# Altium PCB PCB1.PcbDoc
Units mm, origin at the board's own origin, x right, y up, seen from the top; angles counter-clockwise.
Board outline 120 x 170 mm, 2 copper layers (Top Layer, Bottom Layer), stack 1.571 mm thick; 67 components, 49 nets, 279 pads, 46 vias.
Unrouted connection lines stored in the file: 1.
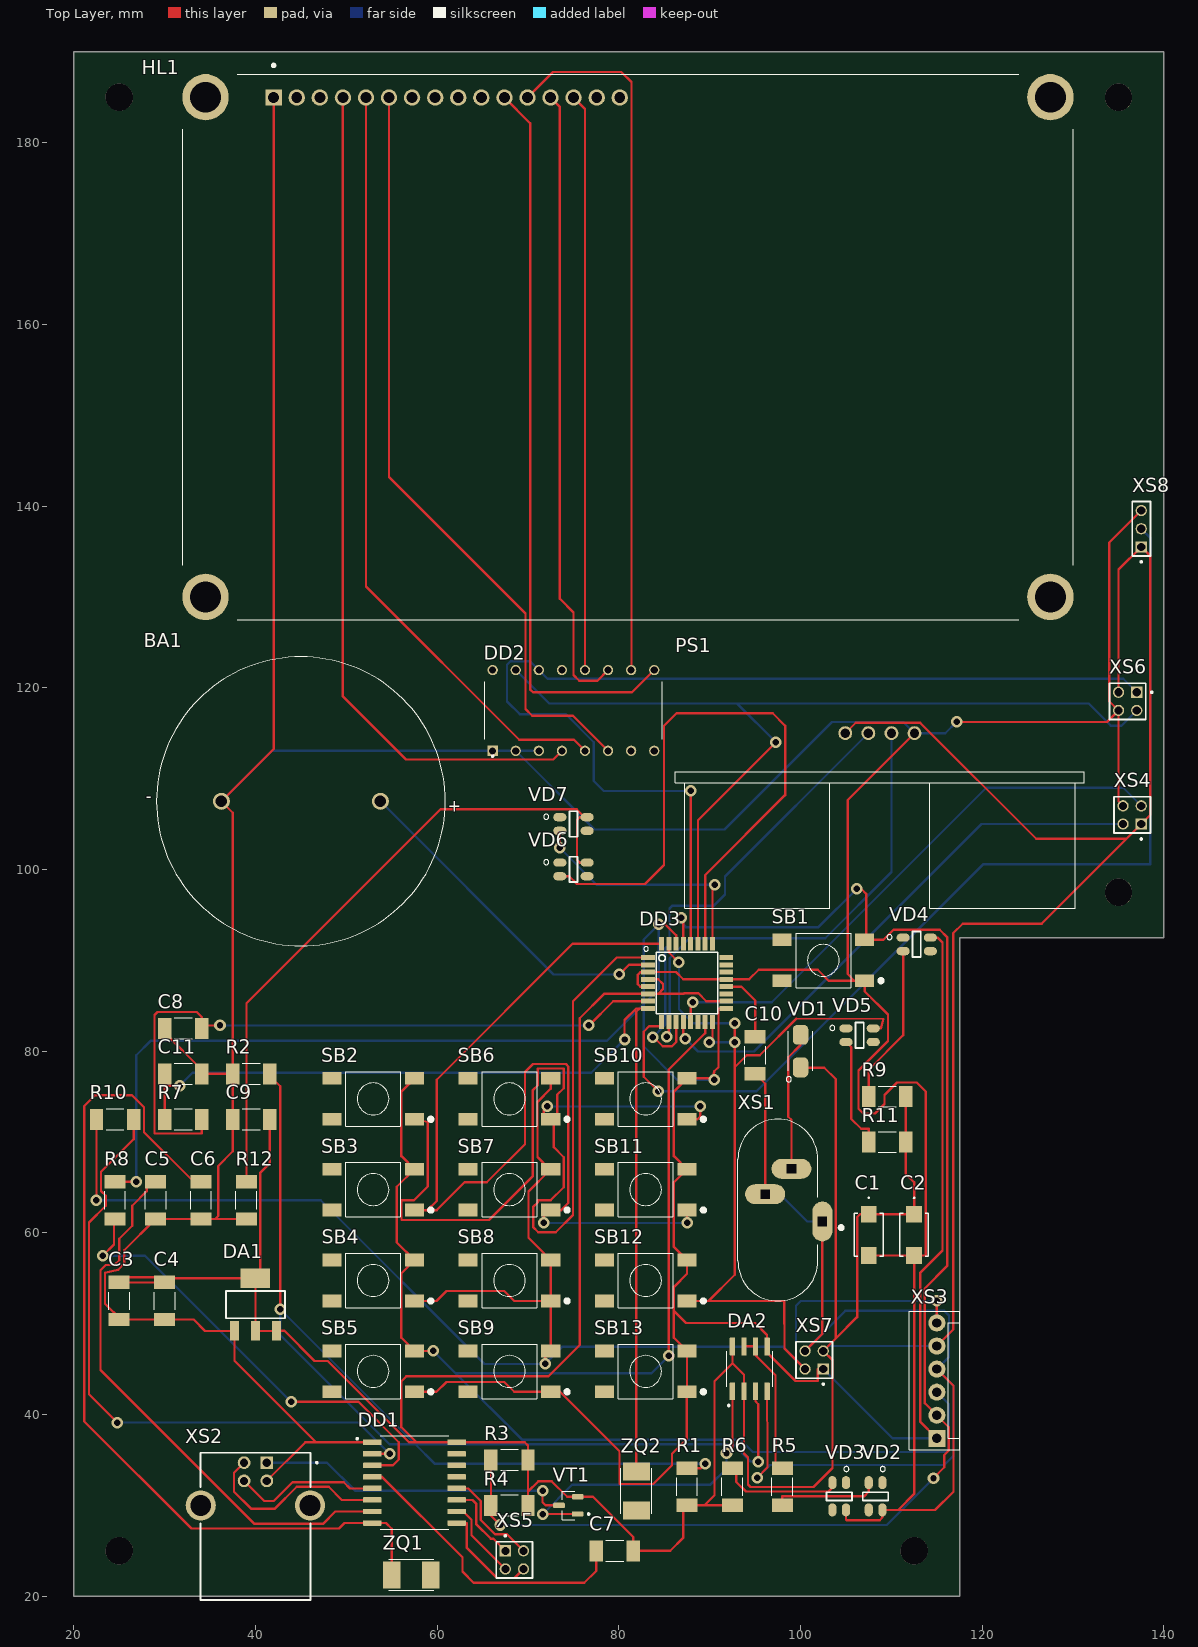
[diagram p0: Top Layer view]
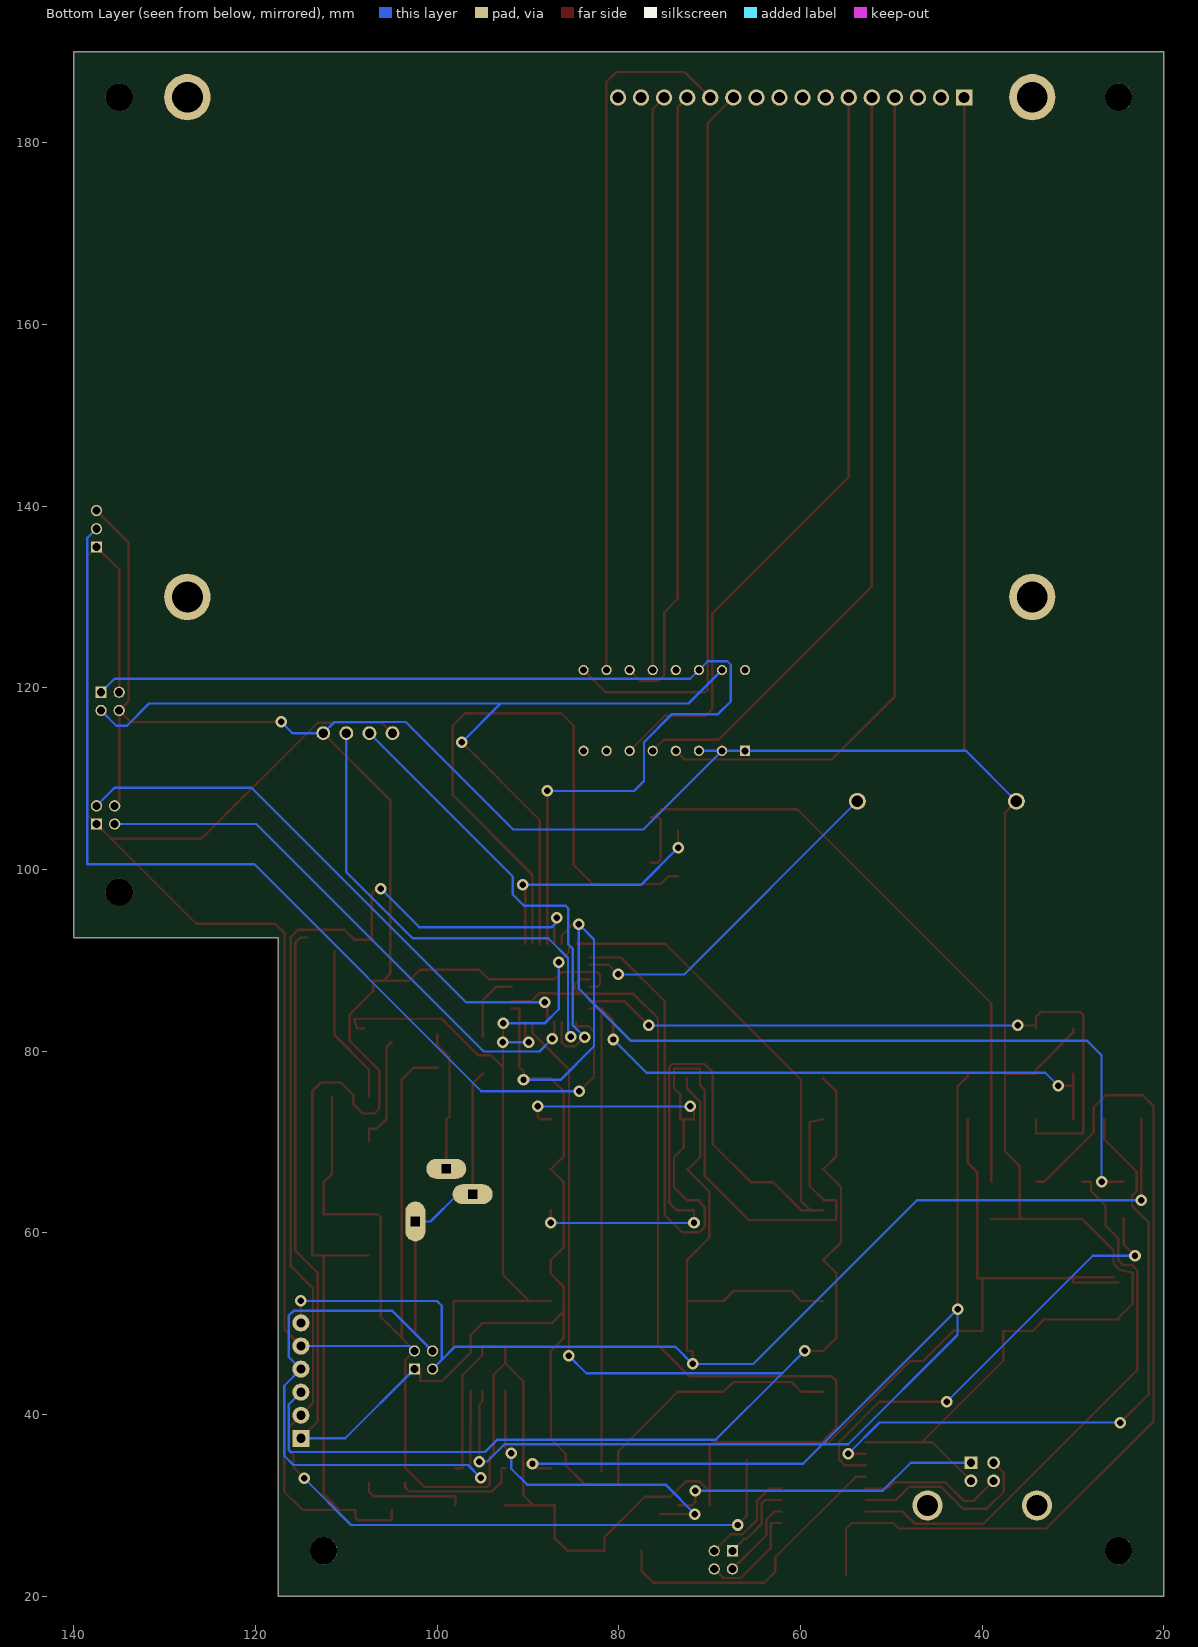
[diagram p1: Bottom Layer view, seen from below]
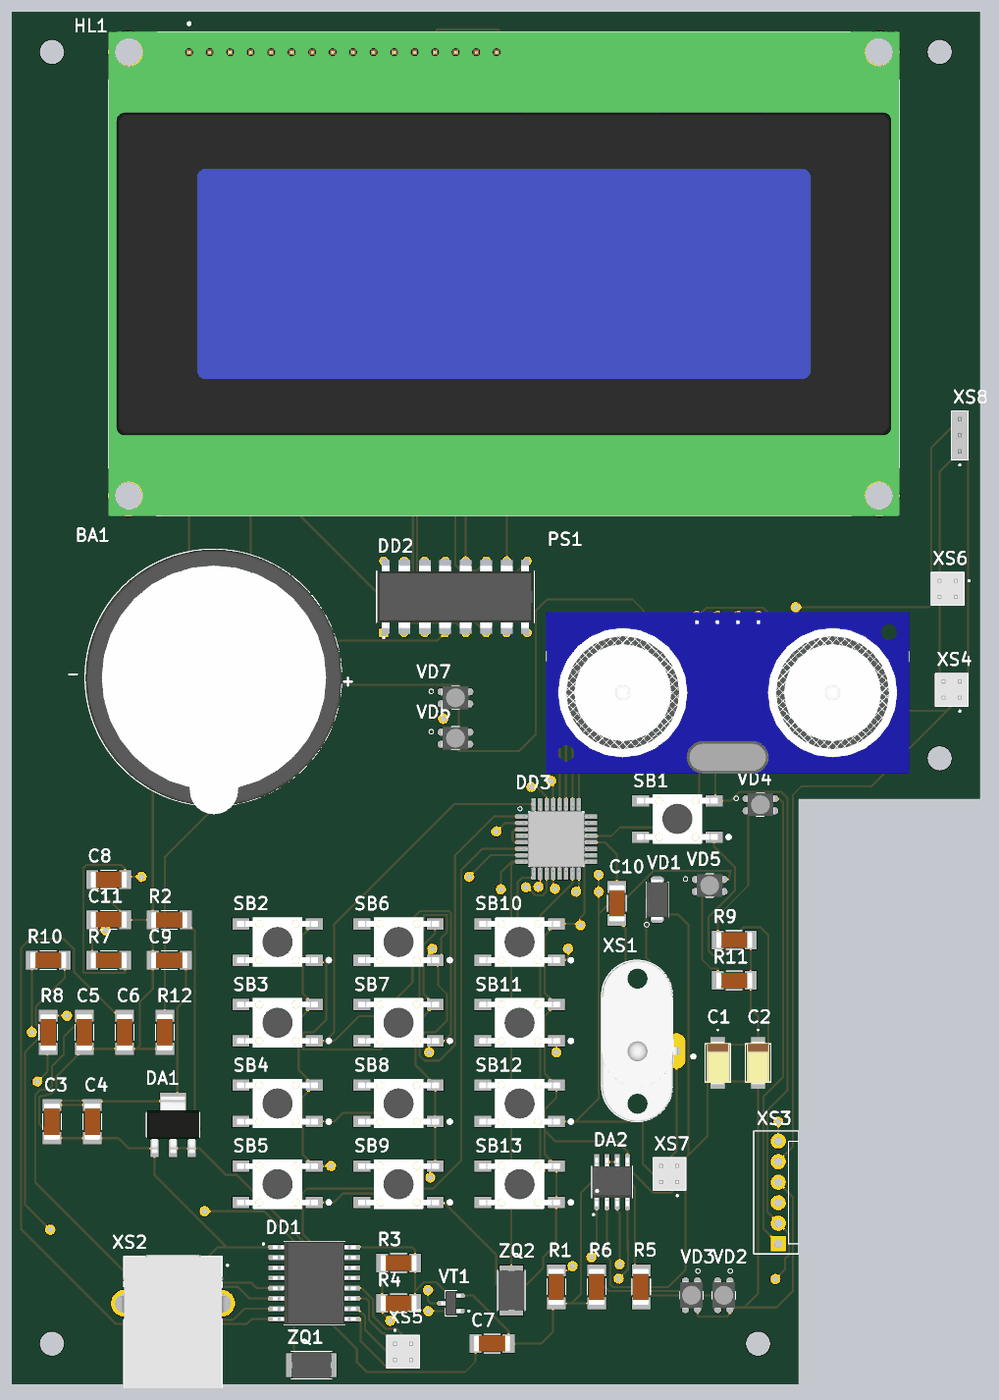
[diagram p2: 3D render of the assembled board from above, using the file's embedded part models]

## Layer stack, top to bottom
Top Solder: solder mask 0.0102, Solder Resist, Dk 3.5
Top Layer: signal copper 0.0356
Dielectric 1: dielectric 1.5, FR-4, Dk 4.8
Bottom Layer: signal copper 0.0356
Bottom Solder: solder mask 0.0102, Solder Resist, Dk 3.5

## Board outline
140,92.5 117.5,92.5 117.5,20 20,20 20,190 140,190

## Design rules (kind name [scope] priority, off if disabled: settings)
Clearance [All] p1: gap=0.254 ignorepadtopadclearanceinfootprint=FALSE except(0: Arc-Hole Track-Hole SMDPad-Hole THPad-Hole Via-Hole Fill-Hole Poly-Hole Region-Hole Text-Hole)
PolygonConnect [All] p1: connectstyle=Relief reliefconductorwidth=0.254 reliefentries=4 polygonreliefangle="90 Angle" airgapwidth=0.254
RoutingVias [All] p1: holewidth=0.711 width=1.27 viastyle="Through Hole" minholewidth=0.711 minwidth=1.27 maxholewidth=0.711 maxwidth=1.27
SolderMaskExpansion [All] p1: expansion=0.102 istentingtop=FALSE
Width "OTHERS width" [InNetClass('OTHER NETS')] p1: maxlimit=0.5 minlimit=0.25 preferedwidth=0.375
Width "POWER width" [InNetClass('POWER NETS')] p2: maxlimit=1 minlimit=0.5 preferedwidth=0.75
Width [All] p3: maxlimit=0.254 minlimit=0.254 preferedwidth=0.254
30 further rules are at their usual default settings.

## Classes and differential pairs
component class Sheet1: *T1 BA1 C1 C2 C3 C4 C5 C6 C7 C8 C9 C10 C11 DA1 DA2 DD1 DD2 DD3 HL1 PS1 R1 R2 R3 R4 R6 R7 R8 R10 R12 SB1 SB2 SB3 SB4 SB5 SB6 SB7 SB8 SB9 SB10 SB11 SB12 SB13 VD1 VD2 VD3 VD4 VD5 VD6 VD7 XS1 XS2 XS3 XS4 XS5 XS6 XS7 XS8 ZQ1 ZQ2

## Components (designator, comment, footprint, x,y, rotation, side; value= is the part's Value field where it differs from the comment)
BA1 "*" CUI_CVS-3108 45,107.5 r180 top
C1 "UPM1C152MHD" SMA/DO-214AC_DTC 107.5,59.77 r270 top
C2 "UPM1C152MHD" SMA/DO-214AC_DTC 112.5,59.77 r270 top
C3 "*" CAPC4520X200N 25,52.5 r90 top
C4 "*" CAPC4520X200N 30,52.5 r90 top
C5 "*" CAPC4520X200N 29.001,63.57 r90 top
C6 "*" CAPC4520X200N 34.001,63.57 r90 top
C7 "*" CAPC4520X200N 79.542,25 r180 top
C8 "*" CAPC4520X200N 32.042,82.5 r0 top
C9 "*" CAPC4520X200N 39.542,72.5 r0 top
C10 "*" CAPC4520X200N 95,79.542 r90 top
C11 "*" CAPC4520X200N 32.042,77.5 r180 top
DA1 "*" SOT230P700X180-4N 40,52.1 r90 top
DA2 "*" SOIC127P599X175-8N 94.405,45.03 r90 top
DD1 "*" SOIC127P1030X265-16N 57.5,32.5 r0 top
DD2 "*" DIP794W45P254L1969H508Q16 75,117.5 r90 top
DD3 "*" QFP80P900X900X120-32N 87.5,87.5 r0 top
HL1 "*" LCD_LCD-20X4B 81,157.5 r0 top
PS1 "*" XCVR_HC-SR04 108.73,115 r0 top
R1 "*" CAPC4520X200N 87.5,32.042 r270 top
R2 "*" CAPC4520X200N 39.542,77.5 r0 top
R3 "*" CAPC4520X200N 67.958,35 r0 top
R4 "*" CAPC4520X200N 67.958,30 r0 top
R5 "*" CAPC4520X200N 98,32.042 r270 top
R6 "*" CAPC4520X200N 92.5,32.042 r270 top
R7 "*" CAPC4520X200N 32.042,72.5 r0 top
R8 "*" CAPC4520X200N 24.542,63.57 r90 top
R9 "*" CAPC4520X200N 109.542,75 r0 top
R10 "*" CAPC4520X200N 24.542,72.5 r180 top
R11 "*" CAPC4520X200N 109.542,70 r0 top
R12 "*" CAPC4520X200N 39.001,63.57 r270 top
SB1 "4-1437565-9" TE_4-1437565-9 102.5,90 r180 top
SB2 "4-1437565-9" TE_4-1437565-9 52.95,74.75 r180 top
SB3 "4-1437565-9" TE_4-1437565-9 52.95,64.75 r180 top
SB4 "4-1437565-9" TE_4-1437565-9 52.95,54.75 r180 top
SB5 "4-1437565-9" TE_4-1437565-9 52.95,44.75 r180 top
SB6 "4-1437565-9" TE_4-1437565-9 67.95,74.75 r180 top
SB7 "4-1437565-9" TE_4-1437565-9 67.95,64.75 r180 top
SB8 "4-1437565-9" TE_4-1437565-9 67.95,54.75 r180 top
SB9 "4-1437565-9" TE_4-1437565-9 67.95,44.75 r180 top
SB10 "4-1437565-9" TE_4-1437565-9 82.95,74.75 r180 top
SB11 "4-1437565-9" TE_4-1437565-9 82.95,64.75 r180 top
SB12 "4-1437565-9" TE_4-1437565-9 82.95,54.75 r180 top
SB13 "4-1437565-9" TE_4-1437565-9 82.95,44.75 r180 top
VD1 "*" DIOAD1060W80L520D270 100,80 r90 top
VD2 "*" SOJ150P350X210-4N 108.25,31 r270 top
VD3 "*" SOJ150P350X210-4N 104.25,31 r270 top
VD4 "*" SOJ150P350X210-4N 112.787,91.75 r0 top
VD5 "*" SOJ150P350X210-4N 106.5,81.75 r0 top
VD6 "*" SOJ150P350X210-4N 75,100 r0 top
VD7 "*" SOJ150P350X210-4N 75,105 r0 top
VT1 "*" SOT95P237X112-3N 74.441,30 r180 top
XS1 "*" CUI_PJ-038B 97.5,62.5 r180 top
XS2 "*" SAMTEC_USB-B-S-X-X-TH 40,30 r0 top
XS3 "*" MOLEX-1X6 115,37.38 r90 top
XS4 "*" SAMTEC_TW-02-03-T-D-335-100 137.5,105 r90 top
XS5 "*" SAMTEC_TW-02-03-T-D-335-100 67.5,25 r270 top
XS6 "*" SAMTEC_TW-02-03-T-D-335-100 137,119.5 r180 top
XS7 "*" SAMTEC_TW-02-03-T-D-335-100 102.5,45 r90 top
XS8 "*" SAMTEC_TW-03-12-L-S-765-200 137.5,135.5 r270 top
ZBOAS205282114 "Comment" "BOASVIEWdrill:Таблица отверстий:0:0:0:0" 52.125,2085.7 r0 top
ZBOAS255984055 "Слой 1" "BOASVIEWlayer:Top Layer:2:1:1:1" 65,2135 r0 top (schematic designator fewf)
ZBOAS255984055 "Comment" "BOASVIEWlayer:Top Overlay:2:1:33:1" 65,2135 r0 top (schematic designator fewf)
ZBOAS1466597440 "Comment" "BOASVIEWside:Вид платы слева:2:0:0:0" 372.5,2475 r0 top
ZBOAS1742184055 "Слой 2" "BOASVIEWlayer:Bottom Layer:2:-2:32:1" 442.5,2135 r180 top (schematic designator fewf)
ZQ1 "*" XTAL500X320X130N 57.15,22.346 r180 top
ZQ2 "*" XTAL500X320X130N 81.93,31.584 r90 top

## Footprints (in the part's own frame and the unit in brackets; to place one, negate y for a bottom-side part, rotate by r counter-clockwise, add the part's x,y. Pads: shape width x height; smd on the part's side, far side on the other; paste and mask are expansions set on the pad)
"BOASVIEWdrill:Таблица отверстий:0:0:0:0" [mm]
"BOASVIEWlayer:Bottom Layer:2:-2:32:1" [mm]
"BOASVIEWlayer:Top Layer:2:1:1:1" [mm]
"BOASVIEWlayer:Top Overlay:2:1:33:1" [mm]
"BOASVIEWside:Вид платы слева:2:0:0:0" [mm]
CAPC4520X200N [mm]
  rect 1.47x2.31 smd: 1(-2.042,0) 2(2.042,0)
  silkscreen extent -0.98,-1.15 0.98,1.15, body extent -2.25,-1.02 2.25,0.98, height 2.02
CUI_CVS-3108 [mm]
  round 1.875 hole 1.25: N(8.75,0) P(-8.75,0)
  silkscreen extent -15.9,-15.9 15.9,15.9, body extent -15.97,-15.87 15.82,16.92, height 15.1
CUI_PJ-038B [mm]
  oval 2.2x4.4 hole 1 square: 1(-4.9,1.25)
  oval 4.4x2.2 hole 1 square: 2(-1.5,-4.55) 3(1.4,-1.75)
  silkscreen extent -7.16,-10 4.4,10, body extent -5.11,-9.97 4.34,10.03, height 13.57
DIOAD1060W80L520D270 [mm]
  rrect54% 2.17x1.69 smd: A(1.795,0) C(-1.795,0)
  silkscreen extent -3.4,-1.36 2.19,1.6, body extent -2.6,-1.35 2.6,1.38, height 2.62
DIP794W45P254L1969H508Q16 [mm]
  rect 1.13x1.13 hole 0.78: 1(-4.445,8.89)
  round 1.13 hole 0.78: 2(-4.445,6.35) 3(-4.445,3.81) 4(-4.445,1.27) 5(-4.445,-1.27) 6(-4.445,-3.81) 7(-4.445,-6.35) 8(-4.445,-8.89) 9(4.445,-8.89) 10(4.445,-6.35) 11(4.445,-3.81) 12(4.445,-1.27) 13(4.445,1.27) 14(4.445,3.81) 15(4.445,6.35) 16(4.445,8.89)
  silkscreen extent -5.13,-9.78 3.18,9.77, body extent -5.46,-9.65 5.46,9.65, height 5.08
LCD_LCD-20X4B [mm]
  rect 1.8x1.8 hole 1.2: 1(-39,27.46)
  round 1.8 hole 1.2: 2(-36.46,27.46) 3(-33.92,27.46) 4(-31.38,27.46) 5(-28.84,27.46) 6(-26.3,27.46) 7(-23.76,27.46) 8(-21.22,27.46) 9(-18.68,27.46) 10(-16.14,27.46) 11(-13.6,27.46) 12(-11.06,27.46) 13(-8.52,27.46) 14(-5.98,27.46) 15(-3.44,27.46) 16(-0.9,27.46)
  round 5.1 hole 3.4: S1(-46.5,27.5) S2(46.5,27.5) S3(-46.5,-27.5) S4(46.5,-27.5)
  silkscreen extent -49,-30 49,31.15, body extent -49,-30 49,30, height 13.54
MOLEX-1X6 [mil]
  rect 74x74 hole 40: 1(0,0)
  round 74 hole 40: 2(100,0) 3(200,0) 4(300,0) 5(400,0) 6(500,0)
  silkscreen extent -50,-100 550,120
QFP80P900X900X120-32N [mm]
  rect 1.5x0.55 smd: 1(-4.3,2.8) 2(-4.3,2) 3(-4.3,1.2) 4(-4.3,0.4) 5(-4.3,-0.4) 6(-4.3,-1.2) 7(-4.3,-2) 8(-4.3,-2.8) 17(4.3,-2.8) 18(4.3,-2) 19(4.3,-1.2) 20(4.3,-0.4) 21(4.3,0.4) 22(4.3,1.2) 23(4.3,2) 24(4.3,2.8)
  rect 0.55x1.5 smd: 9(-2.8,-4.3) 10(-2,-4.3) 11(-1.2,-4.3) 12(-0.4,-4.3) 13(0.4,-4.3) 14(1.2,-4.3) 15(2,-4.3) 16(2.8,-4.3) 25(2.8,4.3) 26(2,4.3) 27(1.2,4.3) 28(0.4,4.3) 29(-0.4,4.3) 30(-1.2,4.3) 31(-2,4.3) 32(-2.8,4.3)
  silkscreen extent -4.75,-3.4 3.4,4, body extent -4.5,-4.49 4.5,4.51, height 1.1
SAMTEC_TW-02-03-T-D-335-100 [mm]
  rect 1.24x1.24 hole 0.89: 01(0,0)
  round 1.24 hole 0.89: 02(0,2) 03(2,0) 04(2,2)
  silkscreen extent -1.75,-1 3,3, body extent -0.98,-0.98 3.02,3.02, height 4.57
SAMTEC_TW-03-12-L-S-765-200 [mm]
  rect 1.24x1.24 hole 0.89: 01(0,0)
  round 1.24 hole 0.89: 02(-2,0) 03(-4,0)
  silkscreen extent -5,-1 1.75,1, body extent -5.03,-1.02 0.97,0.98, height 5.08
SAMTEC_USB-B-S-X-X-TH [mm]
  rect 1.408x1.408 hole 0.9: 1(1.25,4.7)
  round 1.408 hole 0.9: 2(-1.25,4.7) 3(-1.25,2.7) 4(1.25,2.7)
  round 3.316 hole 2.3: S1(-6.02,0) S2(6.02,0)
  silkscreen extent -6.05,-10.4 6.85,5.8, body extent -7.25,-10.51 7.25,5.99, height 10.7
SMA/DO-214AC_DTC [mm]
  rect 1.849x1.752 smd paste+0 mask+0: N(2.27,0) P(-2.27,0)
  silkscreen extent -4.16,-1.57 2.37,1.57, body extent -2.64,-1.4 2.64,1.4, height 2.34
SOIC127P599X175-8N [mm]
  rrect25% 1.97x0.6 smd: 1(-2.47,1.905) 2(-2.47,0.635) 3(-2.47,-0.635) 4(-2.47,-1.905) 5(2.47,-1.905) 6(2.47,-0.635) 7(2.47,0.635) 8(2.47,1.905)
  silkscreen extent -4.14,-2.53 1.95,2.52, body extent -3,-2.45 3,2.45, height 1.75
SOIC127P1030X265-16N [mm]
  rrect25% 2.06x0.6 smd: 1(-4.64,4.445) 2(-4.64,3.175) 3(-4.64,1.905) 4(-4.64,0.635) 5(-4.64,-0.635) 6(-4.64,-1.905) 7(-4.64,-3.175) 8(-4.64,-4.445) 9(4.64,-4.445) 10(4.64,-3.175) 11(4.64,-1.905) 12(4.64,-0.635) 13(4.64,0.635) 14(4.64,1.905) 15(4.64,3.175) 16(4.64,4.445)
  silkscreen extent -6.4,-5.15 3.75,5.15, body extent -5.15,-5.15 5.15,5.15, height 2.65
SOJ150P350X210-4N [mm]
  oval 1.45x0.9 smd: 1(-1.5,0.75) 2(-1.5,-0.75) 3(1.5,-0.75) 4(1.5,0.75)
  silkscreen extent -3.28,-1.4 0.45,1.4, body extent -1.75,-1.4 1.75,1.4, height 2.04
SOT95P237X112-3N [mm]
  rrect50% 1.3x0.59 smd: 1(-1.025,0.95) 2(-1.025,-0.95) 3(1.025,0)
  silkscreen extent -2.32,-1.56 0.7,1.56, body extent -1.2,-1.45 1.2,1.45, height 1.11
SOT230P700X180-4N [mm]
  rect 2.15x1 smd: 1(-2.9,2.3) 2(-2.9,0) 3(-2.9,-2.3)
  rect 2.15x3.25 smd: 4(2.9,0)
  silkscreen extent -1.5,-3.25 1.5,3.25, body extent -3.47,-3.25 3.52,3.25, height 1.68
TE_4-1437565-9 [mm]
  rect 2.1x1.4 smd: 1(-4.55,2.25) 2(4.55,2.25) 3(-4.55,-2.25) 4(4.55,-2.25)
  silkscreen extent -6.55,-3 3,3, body extent -5,-3 5,3, height 4.98
XCVR_HC-SR04 [mm]
  round 1.53 hole 1.02: 1(-3.81,0) 2(-1.27,0) 3(1.27,0) 4(3.81,0)
  silkscreen extent -22.5,-19.27 22.5,-4.27, body extent -22.5,-19.37 22.5,8.16, height 12.38
XTAL500X320X130N [mm]
  rect 1.95x2.95 smd: 1(-2.15,0) 2(2.15,0)
  silkscreen extent -2.5,-1.7 2.5,1.7, body extent -2.5,-1.65 2.5,1.65, height 1.3

## Part data
BA1: library part CVS-3108, "31.8 mm, Round Frame, 0.1 W, 8 Ohm, Neodymium Magnet, Mylar Cone, Speaker", Package="CUI Inc.", Arrow_Electronics-Purchase-URL=https://snapeda.com/shop?store=Arrow+Electronics&id=1474279, Availability=Good, CUI_purchase_URL=https://www.cuidevices.com/product/audio/speakers/miniature-(10-mm~40-mm)/cvs-3108?utm_source=snapeda.com&utm_medium=referral&utm_campaign=snapedaBOM, DigiKey-Purchase-URL=https://snapeda.com/shop?store=DigiKey&id=1474279, MF="CUI Devices", Mouser-Purchase-URL=https://snapeda.com/shop?store=Mouser&id=1474279, MP=CVS-3108, Price=None, SnapEDA_Link=https://www.snapeda.com/parts/CVS-3108/CUI%20Devices/view-part/1474279/?ref=snap
C1 C2: "1500ÂµF 16V Aluminum Electrolytic Capacitors Radial, Can 5000 Hrs @ 105Â°C", Package="Radial Nichicon", Availability=Warning, Check_prices=https://www.snapeda.com/parts/UPM1C152MHD/Nichicon/view-part/2322603/?ref=eda, MF=Nichicon, MP=UPM1C152MHD, Price=None, Purchase-URL=https://pricing.snapeda.com/search/part/UPM1C152MHD/?ref=eda, SnapEDA_Link=https://www.snapeda.com/parts/UPM1C152MHD/Nichicon/view-part/2322603/?ref=snap
C3 C4 C5 C6 C7 C8 C9 C10 C11: library part 1808Y5K00101JXT, Package=None, Availability=Unavailable, MP=1808Y5K00101JXT, Price=None
DA1: library part NCP1117ST50T3G, "Linear Voltage Regulator IC 1 Output 1A SOT-223", Package="TO-261-4 ON Semiconductor", Availability=Unavailable, MF="ON Semiconductor", MP=NCP1117ST50T3G, Price=None, SnapEDA_Link=https://www.snapeda.com/parts/NCP1117ST50T3G/ON%20Semiconductor/view-part/836318/?ref=snap
DA2: library part LM358D, "Dual standard operational amplifier 8-SOIC 0 to 70", Package="SOIC-8 Texas Instruments", Arrow_Asia-Purchase-URL=https://snapeda.com/shop?store=Arrow+Asia&id=4793021, Arrow_Electronics-Purchase-URL=https://snapeda.com/shop?store=Arrow+Electronics&id=4793021, Digi-Key_Part_Number=296-1014-2-ND, DigiKey-Purchase-URL=https://snapeda.com/shop?store=DigiKey&id=4793021, MF="Texas Instruments", Mouser-Purchase-URL=https://snapeda.com/shop?store=Mouser&id=4793021, MP=LM358D, SnapEDA_Link=https://www.snapeda.com/parts/LM358D/Texas%20Instruments/view-part/4793021/?ref=snap, Texas_Instruments-Purchase-URL=https://snapeda.com/shop?store=Texas+Instruments&id=4793021
DD1: library part CH340, "Circuit Breaker Magnetic 3Pole 40A 240VAC", Package=None, Availability=Unavailable, MF=Eaton, MP=CH340, Price=None, SnapEDA_Link=https://www.snapeda.com/parts/CH340/Eaton/view-part/4701946/?ref=snap
DD2: library part PCF8574N, "Remote 8-Bit I/O Expander for I2C-Bus", Package="PDIP-16 Texas Instruments", Arrow_Electronics-Purchase-URL=https://snapeda.com/shop?store=Arrow+Electronics&id=271889, Availability=Unavailable, DigiKey-Purchase-URL=https://snapeda.com/shop?store=DigiKey&id=271889, MF="Texas Instruments", Mouser-Purchase-URL=https://snapeda.com/shop?store=Mouser&id=271889, MP=PCF8574N, Price=None, SnapEDA_Link=https://www.snapeda.com/parts/PCF8574N/Texas%20Instruments/view-part/271889/?ref=snap, Texas_Instruments-Purchase-URL=https://snapeda.com/shop?store=Texas+Instruments&id=271889
DD3: library part ATMEGA328P-AU, "AVR AVRÂ® ATmega Microcontroller IC 8-Bit 20MHz 32KB _16K x 16_ FLASH 32-TQFP _7x7_", Package="TQFP-32 Microchip", Availability=Unavailable, MF=Microchip, MP=ATMEGA328P-AU, Price=None, SnapEDA_Link=https://www.snapeda.com/parts/ATMEGA328P-AU/Microchip/view-part/44280/?ref=snap
HL1: library part LCD-20X4B, "Display Development Tools 20X4 CHARACTER BLUE LCD W/BACKLIGHT", Package=None, Availability=Unavailable, MF=Gravitech, Mouser-Purchase-URL=https://snapeda.com/shop?store=Mouser&id=833821, MP=LCD-20X4B, Price=None, SnapEDA_Link=https://www.snapeda.com/parts/LCD-20X4B/Gravitech/view-part/833821/?ref=snap
PS1: library part HC-SR04, "HC-SR04 Ultrasonic Sensor Platform Evaluation Expansion Board", Package=None, Availability=Unavailable, MF="SparkFun Electronics", MP=HC-SR04, Price=None, SnapEDA_Link=https://www.snapeda.com/parts/HC-SR04/SparkFun%20Electronics/view-part/341106/?ref=snap
R1 R2 R3 R4 R5 R6 R7 R8 R9 R10 R11 R12: library part Component_1
SB1 SB2 SB3 SB4 SB5 SB6 SB7 SB8 SB9 SB10 SB11 SB12 SB13: "Switch Tactile OFF _ON_ SPST Round Button Gull Wing 0.05A 12VDC 1.57N SMD Loose Piece", Contact_Current_Rating="50 mA", Package=None, Configuration_Pole-Throw="Single Pole - Single Throw", Digi-Key_Part_Number=450-1133-ND, Digi-Key_Purchase_URL=https://www.digikey.com/product-detail/en/te-connectivity-alcoswitch-switches/FSM6JSMA/450-1133-ND/525822?utm_source=snapeda&utm_medium=aggregator&utm_campaign=symbol, EU_RoHS_Compliance=Compliant, MF="TE Connectivity", MP=FSM6JSMA, SnapEDA_Link=https://www.snapeda.com/parts/FSM6JSMA/TE%20Connectivity%20ALCOSWITCH%20Switches/view-part/522766/?ref=snap, TE_purchase_URL=https://www.te.com/usa-en/product-4-1437565-9.html?te_bu=Cor&te_type=disp&te_campaign=seda_glo_cor-seda-global-disp-prtnr-fy19-seda-model-bom-cta_sma-317_1&elqCampaignId=32493
VD1: library part 1N4007, "Diode Standard 1000V 1A Through Hole DO-204AL _DO-41_", Package="DO-41 Good-Ark", Availability=Unavailable, MF="ON Semiconductor", MP=1N4007, Price=None, SnapEDA_Link=https://www.snapeda.com/parts/1N4007/ON%20Semiconductor/view-part/2816213/?ref=snap
VD2 VD3 VD4 VD5 VD6 VD7: library part CLA1A-WKW-CXAYB153, "LED Lighting - White, Cool 5500K 3.6V 30mA 4-PLCC", Package="PLCC-4 Cree", Digi-Key_Part_Number=CLA1A-WKW-CXAYB153CT-ND, Digi-Key_Purchase_URL=https://www.digikey.com/product-detail/en/cree-inc/CLA1A-WKW-CXAYB153/CLA1A-WKW-CXAYB153CT-ND/3659978?utm_source=snapeda&utm_medium=aggregator&utm_campaign=symbol, MF="Cree Inc.", MP=CLA1A-WKW-CXAYB153, SnapEDA_Link=https://www.snapeda.com/parts/CLA1A-WKW-CXAYB153/Cree%20Inc./view-part/1050629/?ref=snap
VT1: library part IRLML6402TRPBF, "RoHS Compliant", Package="SOT-23 Infineon", Availability=Unavailable, MF=Infineon, MP=IRLML6402TRPBF, Price=None, SnapEDA_Link=https://www.snapeda.com/parts/IRLML6402TRPBF/Infineon%20Technologies/view-part/523558/?ref=snap
XS1: library part PJ-038B, "2.5 x 6.2 mm, 2.5 A, Horizontal, Panel Mount, Dc Power Jack Connector", Package=None, Availability=Unavailable, MF="CUI Devices", MP=PJ-038B, Price=None, SnapEDA_Link=https://www.snapeda.com/parts/PJ-038B/CUI%20Devices/view-part/1494366/?ref=snap
XS2: library part USB-B-S-X-X-TH, "USB-B (USB TYPE-B) USB 2.0 Receptacle Connector 4 Position Through Hole, Right Angle", Package=None, Availability=Unavailable, MF=Samtec, MP=USB-B-S-S-B-TH, Price=None, SnapEDA_Link=https://www.snapeda.com/parts/USB-B-S-S-B-TH/Samtec%20Inc./view-part/230656/?ref=snap, Toby_UK-Purchase-URL=https://snapeda.com/shop?store=Toby+UK&id=230656
XS3: library part PIC-ICSP, "MICROCHIP ICSP PROG ADAPTER SET", Package=None, Availability=Unavailable, MF="Olimex LTD", MP=PIC-ICSP, Price=None, SnapEDA_Link=https://www.snapeda.com/parts/PIC-ICSP/Olimex%20LTD/view-part/53514/?ref=snap
XS4 XS5 XS6 XS7: library part TW-02-03-T-D-335-100, "4 Position Header Spacer Connector 0.079 (2.00mm) Tin Through Hole", Package=None, Availability=Bad, Check_prices=https://www.snapeda.com/parts/TW-02-03-T-D-335-100/Samtec/view-part/3263296/?ref=eda, MF=Samtec, MP=TW-02-03-T-D-335-100, Price=None, Purchase-URL=https://pricing.snapeda.com/search/part/TW-02-03-T-D-335-100/?ref=eda, SnapEDA_Link=https://www.snapeda.com/parts/TW-02-03-T-D-335-100/Samtec/view-part/3263296/?ref=snap
XS8: library part TW-03-12-L-S-765-200, "CONN BRD STACK 2.00 3POS", Package=None, Availability=Warning, Check_prices=https://www.snapeda.com/parts/TW-03-12-L-S-765-200/Samtec/view-part/3584672/?ref=eda, MF=Samtec, MP=TW-03-12-L-S-765-200, Price=None, Purchase-URL=https://pricing.snapeda.com/search/part/TW-03-12-L-S-765-200/?ref=eda, SnapEDA_Link=https://www.snapeda.com/parts/TW-03-12-L-S-765-200/Samtec/view-part/3584672/?ref=snap
ZQ1 ZQ2: library part ABM3-16.000MHZ-B4Y-T, "16MHz Â±30ppm Crystal 18pF 40 Ohms 2-SMD, No Lead", Package="SMD-2 Abracon", Check_prices=https://www.snapeda.com/parts/ABM3-16.000MHZ-B4Y-T/Abracon%20LLC/view-part/552784/?ref=eda, Digi-Key_Part_Number=535-13579-1-ND, MF=Abracon, MP=ABM3-16.000MHZ-B4Y-T, Purchase-URL=https://pricing.snapeda.com/search/part/ABM3-16.000MHZ-B4Y-T/?ref=eda, SnapEDA_Link=https://www.snapeda.com/parts/ABM3-16.000MHZ-B4Y-T/Abracon%20LLC/view-part/552784/?ref=snap

## Free pads (board coordinates)
  round 3 hole 3 unplated: 1(25,25) 1(25,185) 1(112.5,25) 1(135,185) 2(135,97.5)
  rect 3x1.1 on Mech7: 1(390.675,2052.75)
  rrect50% 2.6x1.18 on Mech9: 1(390.675,2068)
  oval 2.9x1.8 on Mech7: 1(390.8,2060.5)
  rect 4.3x2 on Mech7: 2(390.675,2031.1)
  rrect25% 3.94x1.2 on Mech7: 2(390.675,2045.5)
  rect 6.5x4.3 on Mech7: ""(390.55,2022.875)
  rect 4.2x2.8 on Mech7: ""(390.675,2038)

## Via types
v1: diameter 1.27, hole 0.711, Top Layer to Bottom Layer, 46 vias

## Nets (pads, with @x,y where several pads share a name; then routed paths per layer and width w, separated by ;. In a path a pad name is that pad's centre, name@x,y a point inside that pad or via, vN(x,y) a via of type N, cw(c..) or ccw(c..) an arc to the next point about the centre after c; other vN are vias at no path point)
GND: BA1.N C1.N C2.N C3.1 C4.1 C5.1 C6.1 C8.1 C9.1 C10.1 C11.1 DA1.1 DA2.4 DD1.1 DD2.1 DD2.2 DD2.3 DD3.3 DD3.5 DD3.21 HL1.1 PS1.4 R2.1 R12.2 SB1.1 VD2.4 VD3.4 XS1.1 XS1.3 XS2.4 XS3.4 XS4.04 XS6.04 XS7.04 XS8.03 | length 624
  Top Layer w0.254: C3.1 C3.1@25.188,50.458 ; C8.1 30,82.037 34.084,77.953 C11.1 35.789,77.5 R2.1 ; R12.2 35.56,61.528 ; XS2.4 45.495,36.945 46.672,36.945 ; HL1.1 42,113.25 BA1.N 37.5,106.25 R2.1 ; DD1.1 46.672,36.945 ; DD3.5 82.343,87.1 82.067,87.376 82.067,88.392 82.375,88.7 DD3.3 86.297,88.7 87.097,87.9 DD3.21 94.336,87.9 95.386,88.951 101.879,88.951 103.08,87.75 105.918,87.75 ; C10.1 96.1,76.4 XS1.3 ; v1(95.225,33.045) 96.368,34.188 96.368,35.839 DA2.4 ; XS7.04 102.4,48.9 XS1.1 ; VD3.4 105,28.448 105.076,28.372 108.712,28.372 109,28.66 VD2.4@109,29.489 ; C1.N C2.N ; VD2.4 VD2.4@109,29.489 ; PS1.4 105.181,107.641 105.181,88.487 105.918,87.75 ; XS3.4 116.829,43.171 116.829,31.51 114.808,29.489 110.744,29.489 ; v1(117.167,116.23) 133.73,116.23 XS6.04 ; XS4.04 135,107.5 XS6.04 ; XS8.03 133.985,135.985 133.985,118.515 XS6.04 ; C3.1@25.188,50.458 23.444,52.202 23.444,55.593 24.892,55.938 25.566,56.612 25.566,58.093 C5.1 C6.1 35.56,61.528 ; C3.1@25.188,50.458 27.483,50.458 C4.1 33.198,50.458 34.456,49.2 DA1.1 37.7,45.917 46.672,36.945 ; 35.56,61.528 35.89,61.858 35.89,67.361 37.5,68.971 C9.1 R2.1 ; 105.918,87.75 SB1.1 107.05,86.6 109.626,84.023 109.626,81.128 106.375,77.876 106.375,73.66 106.909,73.127 108.204,73.127 109.245,74.168 109.245,75.184 110.617,76.556 112.776,76.556 113.767,75.565 113.767,57.5 C2.N ; VD2.4@109,29.489 110.744,29.489 ; 110.744,29.489 112.5,31.245 C2.N
  Bottom Layer w0.254: BA1.N 41.805,113.055 DD2.1 DD2.2 ; DD2.3 DD2.2 ; v1(95.225,33.045) 96.622,34.442 115.824,34.442 116.84,35.458 116.84,43.16 XS3.4 116.332,46.332 116.332,50.902 115.824,51.41 104.91,51.41 XS7.04 ; XS1.3 97.739,64.25 100.739,61.25 XS1.1 ; v1(117.167,116.23) 115.937,115 PS1.4 111.31,116.23 103.454,116.23 91.618,104.394 77.311,104.394 DD2.2
NetBA1_P: BA1.P DD3.2 | length 37.8
  Top Layer w0.254: v1(80.061,88.443) 81.118,89.5 DD3.2
  Bottom Layer w0.254: BA1.P 72.807,88.443 v1(80.061,88.443)
NetC5_2: C5.2 DD1.7 ZQ1.1 | length 61.9
  Top Layer w0.254: C5.2 28.042,65.612 28.042,64.592 26.441,62.992 26.441,60.768 25.016,59.342 25.016,56.984 24.496,56.464 23.52,56.464 22.936,55.88 22.936,44.907 39.882,27.961 47.417,27.961 48.781,29.325 DD1.7
NetC6_2: C6.2 DD1.8 ZQ1.2 | length 97.9
  Top Layer w0.254: C6.2 33.194,65.612 27.737,71.069 27.737,73.812 26.416,75.133 22.327,75.133 21.16,73.966 21.16,39.241 32.948,27.453 49.195,27.453 49.797,28.055 DD1.8 54.377,28.055 55,27.432 ZQ1.2
NetC7_2: C7.2 DD1.4 | length 33.1
  Top Layer w0.254: DD1.4 53.936,33.135 62.789,24.282 62.789,22.708 64.008,21.488 76.2,21.488 77.5,22.788 C7.2
NetC8_2: C8.2 DD3.7 R7.2 | length 76.8
  Top Layer w0.254: R7.2 34.084,70.968 34.059,70.942 28.88,70.942 28.88,83.972 29.21,84.303 33.528,84.303 34.084,83.747 C8.2@34.084,82.829 ; C8.2 C8.2@34.084,82.829 ; v1(36.093,82.829) C8.2@34.084,82.829 ; v1(76.708,82.829) 79.379,85.5 DD3.7
  Bottom Layer w0.254: v1(36.093,82.829) v1(76.708,82.829)
NetC10_2: C10.2 DD3.20 | length 7.8
  Top Layer w0.254: DD3.20 93.472,87.1 95,85.572 C10.2
NetC11_2: C11.2 DD3.8 R7.1 ZQ2.2 | length 114.1
  Top Layer w0.254: R7.1 30,74.981 30,76.2 ; C11.2 30,76.2 ; v1(31.648,76.2) 30,76.2 ; v1(80.629,81.28) 80.629,83.414 81.915,84.7 82.287,84.7 ; ZQ2.2 81.915,33.734 81.915,84.328 82.287,84.7 ; DD3.8 82.287,84.7
  Bottom Layer w0.254: v1(31.648,76.2) 33.071,77.622 76.971,77.622 v1(80.629,81.28)
NetDA2_1: DA2.1 VT1.1 | length 34.9
  Top Layer w0.254: v1(71.628,29.032) 71.646,29.05 VT1.1 ; v1(91.846,35.712) 92.5,36.366 DA2.1
  Bottom Layer w0.254: v1(71.628,29.032) 74.879,32.283 90.094,32.283 91.846,34.036 v1(91.846,35.712)
NetDA2_3: DA2.3 R1.1 R2.2 | length 153.1
  Top Layer w0.254: R2.2 R2.2@41.584,77.267 ; v1(42.723,51.587) 42.723,76.124 ; R1.1 88.999,34.084 v1(89.51,34.595) ; DA2.3 95.04,41.453 95.352,41.141 v1(95.352,34.823) ; R2.2@41.584,77.267 41.584,77.263 42.723,76.124 ; R2.2@41.584,77.267 42.723,76.128 42.723,76.124
  Bottom Layer w0.254: v1(89.51,34.595) 59.715,34.595 57.582,36.728 ; v1(95.352,34.823) 94.488,34.823 92.583,36.728 57.582,36.728 ; 57.582,36.728 54.762,36.728 42.723,48.768 v1(42.723,51.587) 57.582,36.728
NetDA2_5: DA2.5 DD3.17 DD3.30 R8.2 SB5.1 SB9.1 SB10.3 SB11.3 SB12.3 SB13.1 SB13.3 VD4.4 XS3.1 XS7.01 | length 301.4
  Top Layer w0.254: R8.2 v1(26.873,65.612) ; SB5.1 59.924,42.5 61.011,43.586 67.392,43.586 68.478,42.5 SB9.1 73.508,42.5 80.061,35.947 80.061,32.36 83.795,32.36 85.852,34.417 85.852,35.687 87.478,37.313 87.478,42.5 SB13.1 SB13.3 86.055,48.445 86.055,51.384 ; v1(84.404,93.955) 85.09,93.955 86.3,92.745 DD3.30 ; v1(90.5,76.835) v1@90.335,77 ; DD3.17 90.957,84.7 90.957,78.232 90.5,77.775 v1@90.335,77 ; XS7.01 101.879,45 101.879,43.695 101.873,43.688 99.434,43.688 96.31,46.812 DA2.5 96.31,48.768 95.015,50.063 87.376,50.063 86.055,51.384 ; VD4.4 115.069,92.5 115.621,91.948 115.621,58.039 113.157,55.575 113.157,39.223 XS3.1 ; 86.055,51.384 86.055,54.051 87.5,55.496 SB12.3 86.055,58.445 86.055,65.555 SB11.3 86.055,68.445 86.055,75.555 SB10.3 v1@90.335,77
  Bottom Layer w0.254: v1(26.873,65.612) 26.873,79.553 28.448,81.128 78.664,81.128 82.728,85.192 ; v1(90.5,76.835) 86.436,76.835 82.728,80.543 82.728,85.192 ; XS7.01 110.12,37.38 XS3.1 ; 82.728,85.192 84.404,86.868 v1(84.404,93.955) 82.728,92.278 82.728,85.192
NetDA2_6: DA2.6 DA2.7 R5.1 | length 16.4
  Top Layer w0.254: DA2.7 DA2.6 95.04,46.514 97.231,44.323 97.231,34.084 R5.1
NetDD1_2: DD1.2 R10.1 | length 70.4
  Top Layer w0.254: v1(24.79,39.116) 21.668,42.239 21.668,61.139 23.52,62.992 23.52,64.084 23.006,64.599 23.006,66.726 26.584,70.304 R10.1 ; DD1.2 v1(54.762,35.675)
  Bottom Layer w0.254: v1(24.79,39.116) 51.321,39.116 v1(54.762,35.675)
NetDD1_3: DD1.3 R8.1 | length 50.9
  Top Layer w0.254: v1(23.19,57.48) 24.435,58.725 24.435,61.528 R8.1 ; v1(43.917,41.402) 51.333,41.402 55.778,36.957 55.778,35.052 55.131,34.405 DD1.3
  Bottom Layer w0.254: v1(23.19,57.48) 27.838,57.48 v1(43.917,41.402)
NetDD1_5: DD1.5 XS2.3 | length 16.2
  Top Layer w0.254: XS2.3 40.97,30.48 42.012,30.48 44.079,32.547 49.712,32.547 50.394,31.865 DD1.5
NetDD1_6: DD1.6 XS2.2 | length 21.2
  Top Layer w0.254: XS2.2 37.643,33.593 37.643,31.496 39.497,29.642 42.139,29.642 44.536,32.039 48.057,32.039 49.501,30.595 DD1.6
NetDD1_9: DD1.9 XS5.04 | length 11.9
  Top Layer w0.254: DD1.9 63.271,28.055 63.271,25.298 66.573,21.996 68.496,21.996 XS5.04
NetDD1_10: DD1.10 XS5.03 | length 9
  Top Layer w0.254: DD1.10 62.865,29.325 63.779,28.411 63.779,26.721 XS5.03
NetDD1_11: DD1.11 XS5.01 | length 9
  Top Layer w0.254: DD1.11 63.9,30.595 64.287,30.208 64.287,27.94 65.913,26.314 66.186,26.314 XS5.01
NetDD1_12: DD1.12 XS5.02 | length 11.4
  Top Layer w0.254: DD1.12 63.41,31.865 64.795,30.48 64.795,28.4 66.373,26.822 67.678,26.822 XS5.02
NetDD2_4: DD2.4 HL1.4 | length 93.3
  Top Layer w0.254: HL1.4 49.62,119.036 56.566,112.09 72.765,112.09 DD2.4
NetDD2_5: DD2.5 HL1.5 | length 85.4
  Top Layer w0.254: HL1.5 52.16,131.152 69.037,114.275 75.05,114.275 DD2.5
NetDD2_6: DD2.6 HL1.6 | length 84.5
  Top Layer w0.254: HL1.6 54.7,143.191 69.723,128.168 69.723,117.653 70.46,116.916 74.949,116.916 DD2.6
NetDD2_9: DD2.9 HL1.11 | length 81.1
  Top Layer w0.254: HL1.11 70.231,182.129 70.231,119.812 70.542,119.501 81.446,119.501 DD2.9
NetDD2_10: DD2.10 HL1.12 | length 77.8
  Top Layer w0.254: HL1.12 72.762,187.782 80.264,187.782 81.382,186.665 81.382,121.945 DD2.10
NetDD2_11: DD2.11 HL1.13 | length 69.1
  Top Layer w0.254: HL1.13 73.508,183.932 73.508,129.794 75.006,128.295 75.006,121.412 75.641,120.777 77.642,120.777 DD2.11
NetDD2_12: DD2.12 HL1.14 | length 63.5
  Top Layer w0.254: HL1.14 76.27,183.71 DD2.12
NetDD2_14: DD2.14 DD3.28 XS6.01 | length 118.5
  Top Layer w0.254: DD3.28 v1(87.9,108.636)
  Bottom Layer w0.254: v1(87.9,108.636) 78.334,108.636 77.241,109.728 77.241,113.995 74.143,117.094 69.088,117.094 67.691,118.491 67.691,122.53 68.072,122.911 70.224,122.911 DD2.14 72.155,120.98 135.52,120.98 XS6.01
NetDD2_15: DD2.15 DD3.27 XS6.02 | length 103.4
  Top Layer w0.254: DD3.27 88.7,105.413 v1(97.282,113.995)
  Bottom Layer w0.254: DD2.15 72.333,118.262 93.015,118.262 ; v1(97.282,113.995) 93.015,118.262 ; XS6.02 135.324,115.824 134.156,115.824 131.717,118.262 93.015,118.262
NetDD3_1: DD3.1 SB2.1 SB6.1 SB10.1 | length 127.8
  Top Layer w0.254: SB2.1 58.979,72.195 58.979,65.126 57.434,63.581 56.069,63.581 56.069,61.417 65.71,61.417 70.536,66.243 70.536,75.717 71.069,76.251 71.069,78.081 73.931,78.081 73.931,75.919 73.228,75.216 73.228,72.5 SB6.1@72.847,72.5 ; v1(72.136,73.914) 71.73,73.508 71.73,72.5 SB6.1 SB6.1@72.847,72.5 ; DD3.1 79.768,90.3 74.955,85.487 74.955,61.976 73.05,60.071 71.12,60.071 70.561,60.63 70.561,62.829 71.069,63.337 71.069,63.581 72.488,63.581 73.931,65.024 73.931,68.326 72.847,69.41 SB6.1@72.847,72.5 ; SB10.1 88.646,72.5 88.951,72.805 v1(88.951,73.914)
  Bottom Layer w0.254: v1(72.136,73.914) v1(88.951,73.914)
NetDD3_9: DD3.9 XS8.02 | length 111.8
  Top Layer w0.254: v1(84.339,75.579) 82.728,77.191 82.728,82.144 83.312,82.728 84.7,82.728 DD3.9
  Bottom Layer w0.254: v1(84.339,75.579) 95.137,75.579 120.142,100.584 138.506,100.584 138.506,136.494 XS8.02
NetDD3_10: DD3.10 PS1.3 | length 54.1
  Top Layer w0.254: v1(85.293,81.585) 85.5,81.792 DD3.10
  Bottom Layer w0.254: v1(85.293,81.585) 85.598,81.89 85.598,90.246 87.782,92.431 102.718,92.431 110,99.713 PS1.3
NetDD3_11: DD3.11 PS1.2 | length 51.3
  Top Layer w0.254: v1(83.744,81.534) 83.847,81.534 84.836,80.545 85.852,80.545 86.309,81.002 86.309,82.592 86.3,82.601 DD3.11
  Bottom Layer w0.254: v1(83.744,81.534) 85.09,82.88 85.09,91.288 85.567,91.765 85.567,95.702 85.852,95.987 90.424,95.987 91.68,97.243 91.68,99.22 PS1.2
NetDD3_12: DD3.12 XS4.02 | length 61.1
  Top Layer w0.254: DD3.12 87.1,81.581 v1(87.325,81.356)
  Bottom Layer w0.254: v1(87.325,81.356) 88.722,79.959 94.878,79.959 119.919,105 XS4.02
NetDD3_13: DD3.13 XS4.03 | length 62.2
  Top Layer w0.254: DD3.13 87.9,85.131 v1(88.138,85.369)
  Bottom Layer w0.254: v1(88.138,85.369) 96.825,85.369 120.447,108.991 135.509,108.991 XS4.03
NetDD3_15: DD3.15 SB2.3 SB3.3 SB4.3 SB5.3 XS3.3 | length 167.1
  Top Layer w0.254: SB2.3 56.058,75.558 56.058,68.442 SB3.3 55.561,65.061 55.561,58.939 SB4.3 56.058,55.558 56.058,48.442 SB5.3 v1(59.563,47) ; v1(85.496,46.457) 85.496,77.978 89.5,81.982 DD3.15
  Bottom Layer w0.254: v1(59.563,47) 62.011,44.552 ; v1(85.496,46.457) 83.591,44.552 62.011,44.552 ; XS3.3 116.322,41.138 116.322,36.093 116.093,35.864 94.743,35.864 93.37,37.236 69.327,37.236 62.011,44.552
NetDD3_16: DD3.16 DD3.31 R10.2 SB4.1 SB6.3 SB7.3 SB8.1 SB8.3 SB9.3 SB12.1 VD5.4 XS3.6 XS7.02 | length 262.9
  Top Layer w0.254: v1(22.498,63.576) 22.498,67.234 22.5,67.236 R10.2 ; SB4.1 59.917,52.5 61.011,53.594 67.384,53.594 68.478,52.5 SB8.1 ; v1(71.882,45.568) 71.882,47 SB9.3 SB8.1 ; SB7.3 SB7.3@72.444,66.944 ; SB6.3 72.5,75.871 71.044,74.415 71.044,68.343 SB7.3@72.444,66.944 ; DD3.31 85.5,90.878 v1(86.614,89.764) ; SB12.1 89.863,52.5 ; v1(89.941,80.975) 90.3,81.334 DD3.16 ; v1(92.748,83.083) v1@92.748,80.62 ; v1(92.761,80.975) v1@92.748,80.62 ; XS7.02 98.222,47.278 98.198,52.5 89.863,52.5 ; VD5.4 108.814,82.5 109.118,83.541 99.543,83.591 95.504,79.553 94.069,79.553 92.748,78.232 ; XS3.6 v1(115,52.502) ; SB7.3@72.444,66.944 70.053,64.553 70.053,59.447 SB8.3 SB8.1 ; 89.863,52.5 92.748,55.385 92.748,78.232 ; 92.748,78.232 v1@92.748,80.62
  Bottom Layer w0.254: v1(22.498,63.576) 47.193,63.576 65.202,45.568 v1(71.882,45.568) 73.787,47.473 98.027,47.473 99.492,46.008 ; v1(86.614,89.764) 86.614,84.607 88.138,83.083 v1(92.748,83.083) ; v1(89.941,80.975) v1(92.761,80.975) ; XS7.02 99.492,46.008 ; v1(115,52.502) 100.025,52.502 99.492,51.968 99.492,46.008
NetDD3_25: DD3.25 VD7.2 | length 27.3
  Top Layer w0.254: v1(73.482,102.387) 73.482,104.25 VD7.2 ; DD3.25 90.3,98.022 v1(90.576,98.298)
  Bottom Layer w0.254: v1(73.482,102.387) 77.572,98.298 v1(90.576,98.298)
NetDD3_26: DD3.26 VD6.2 | length 70.2
  Top Layer w0.254: VD6.2 74.537,99.25 75.387,98.4 82.88,98.4 84.963,100.482 84.963,115.824 86.335,117.196 96.926,117.196 98.298,115.824 98.298,108.179 89.5,99.381 DD3.26
NetDD3_29: DD3.29 R3.1 R4.1 SB1.3 XS3.2 | length 161.1
  Top Layer w0.254: R3.1 R4.1 65.916,28.854 v1(66.932,27.838) ; v1(86.855,94.704) 87.1,94.459 DD3.29 ; v1(106.197,97.866) 106.68,97.866 107.213,97.333 SB1.3@107.213,92.25 ; SB1.3 SB1.3@107.213,92.25 ; v1(114.63,32.995) 115.824,34.188 115.824,35.546 116.321,36.043 116.321,38.599 XS3.2 113.665,41.255 113.665,53.876 116.129,56.34 116.129,92.558 115.316,93.37 110.236,93.37 109.116,92.25 SB1.3@107.213,92.25
  Bottom Layer w0.254: v1(66.932,27.838) 109.474,27.838 v1(114.63,32.995) ; v1(86.855,94.704) 86.589,94.437 87.376,93.65 101.981,93.65 v1(106.197,97.866)
NetDD3_32: DD3.32 SB3.1 SB7.1 SB11.1 | length 110.8
  Top Layer w0.254: SB3.1 58.928,62.5 ; v1(71.73,61.087) 71.73,62.5 SB7.1 73.66,62.5 74.439,63.279 74.439,78.318 74.168,78.589 70.561,78.589 69.659,77.687 69.659,69.761 65.456,65.557 63.001,65.557 59.944,62.5 58.928,62.5 ; DD3.32 84.7,91.821 74.905,91.821 59.944,76.86 59.944,63.516 58.928,62.5 ; SB11.1 87.503,62.5 v1(87.503,61.087)
  Bottom Layer w0.254: v1(71.73,61.087) v1(87.503,61.087)
NetR5_2: R5.2 VD2.2 | length 11.7
  Top Layer w0.254: R5.2 97.993,30 97.993,30.988 106.992,30.988 107.5,31.496 VD2.2
NetR6_1: R6.1 VD3.2 | length 13.7
  Top Layer w0.254: R6.1 92.913,34.084 92.913,32.588 93.98,31.521 103.068,31.521 103.5,31.953 VD3.2
NetR9_1: R9.1 VD4.2 | length 17.6
  Top Layer w0.254: R9.1 107.5,77.96 111.303,81.763 111.303,91 VD4.2
NetR11_1: R11.1 VD5.2 | length 12.5
  Top Layer w0.254: VD5.2 105.029,81 105.588,80.441 105.588,72.542 106.68,71.45 107.5,71.45 R11.1
NetR12_1: R12.1 VD6.4 VD7.4 | length 73
  Top Layer w0.254: R12.1 39.014,65.612 39.014,85.268 60.376,106.629 75.346,106.629 VD7.4@76.225,105.75 ; VD6.4 75.692,100.75 75.387,101.055 75.387,105.445 75.692,105.75 VD7.4@76.225,105.75 ; VD7.4 VD7.4@76.225,105.75
NetVD1_A: VD1.A XS1.2 | length 15.4
  Top Layer w0.254: XS1.2 99,72.441 98.654,72.787 98.654,79.324 100,80.671 VD1.A
NetVT1_3: VT1.3 XS2.1 | length 34.9
  Top Layer w0.254: v1(71.603,31.623) 71.603,30.353 71.956,30 VT1.3
  Bottom Layer w0.254: XS2.1 47.875,34.7 50.952,31.623 v1(71.603,31.623)
VCC: C1.P C2.P C3.2 C4.2 C7.1 C9.2 DA1.2 DA1.3 DA1.4 DA2.2 DA2.8 DD1.16 DD3.4 DD3.6 DD3.18 PS1.1 R1.2 R3.2 R4.2 R6.2 R9.2 R11.2 VD1.C VT1.2 XS3.5 XS4.01 XS6.03 XS7.03 XS8.01 | length 498.3
  Top Layer w0.254: C3.2 C4.2 30,55.016 39.43,55.016 39.446,55 DA1.4 ; C3.2@25.5,55.117 C4.2@30.5,55.117 ; C9.2 41.584,67.695 40.538,66.65 40.538,55 DA1.4 ; R4.2 70,31.52 ; DD3.4 84.337,87.9 84.861,87.376 84.861,86.833 84.328,86.3 ; DD3.18 89.615,85.5 88.729,86.385 87.207,86.385 87.122,86.3 84.328,86.3 ; R6.2 89.408,30 ; DA2.8 92.5,45.644 ; VD1.C 100,78.181 102.616,78.181 103.886,76.911 103.886,48.386 ; PS1.1 106.074,116.154 113.157,116.154 125.933,103.378 135.878,103.378 ; R9.2 R11.2 111.584,66.473 112.5,65.557 C2.P C1.P 106.542,62.041 106.223,61.722 106.223,50.723 103.886,48.386 ; XS3.5 116.815,49.355 116.815,92.989 117.856,94.031 126.531,94.031 135.878,103.378 ; XS6.03 135,133 XS8.01 138.506,134.494 138.506,106.006 XS4.01 135.878,103.378 ; DA1.4 DA1.2 DA1.3 42.3,49.225 43.18,49.225 46.507,45.898 47.943,45.898 56.896,36.945 57.721,36.945 ; 57.721,36.945 DD1.16 69.631,36.945 70,36.576 R3.2 70,31.52 ; 57.721,36.945 56.058,38.608 56.058,43.663 56.591,44.196 72.238,44.196 75.692,47.65 75.692,83.617 78.375,86.3 DD3.6 84.328,86.3 ; 70,31.52 71.12,32.64 72.619,32.64 74.309,30.95 VT1.2 77.152,30.95 81.584,26.518 C7.1 81.584,24.994 85.649,24.994 87.071,26.416 87.071,30 R1.2 89.408,30 ; 89.408,30 90.526,31.118 90.526,43.669 92.5,45.644 ; 92.5,45.644 93.77,44.374 DA2.2 93.77,35.719 94.209,35.281 94.209,32.308 94.488,32.029 101.422,32.029 103.505,34.112 103.505,45.995 XS7.03 103.886,48.386
  Bottom Layer w0.254: XS7.03 103.04,47.54 XS3.5
pads on no net: DD1.13 DD1.14 DD1.15 DD2.7 DD2.8 DD2.13 DD2.16 DD3.14 DD3.19 DD3.22 DD3.23 DD3.24 HL1.2 HL1.3 HL1.7 HL1.8 HL1.9 HL1.10 HL1.15 HL1.16 HL1.S1 HL1.S2 HL1.S3 HL1.S4 SB1.2 SB1.4 SB2.2 SB2.4 SB3.2 SB3.4 SB4.2 SB4.4 SB5.2 SB5.4 SB6.2 SB6.4 SB7.2 SB7.4 SB8.2 SB8.4 SB9.2 SB9.4 SB10.2 SB10.4 SB11.2 SB11.4 SB12.2 SB12.4 SB13.2 SB13.4 VD2.1 VD2.3 VD3.1 VD3.3 VD4.1 VD4.3 VD5.1 VD5.3 VD6.1 VD6.3 VD7.1 VD7.3 XS2.S1 XS2.S2 ZQ2.1

## Silkscreen, mask and mechanical layers (free items; w line width, h text height)
Mechanical 7:
  circle w0.254: c379.725,2428.775 r2
  circle w0.254: c368.475,2428.225 r2
  lines w0.254: 260,2135 320.675,2135 ; 358.975,2418.975 372.475,2428.475 365.475,2431.975 ; 382.725,2425.025 375.725,2428.525 389.225,2438.025
  lines w0.5: 253.944,2067.5 273.943,2067.5
  lines w0.6: 248.943,2064 343.943,2064 ; 248.943,2071.5 343.943,2071.5 ; 278.943,2056.5 278.944,2086.5 ; 313.943,2056.5 313.943,2086.5 ; 375.392,2019.21 442.392,2019.21 ; 375.392,2019.333 375.392,2086.71 442.392,2086.71 442.392,2019.217 ; 375.392,2026.71 442.392,2026.71 ; 375.392,2034.21 442.392,2034.21 ; 375.392,2041.71 442.392,2041.71 ; 375.392,2049.21 442.392,2049.21 ; 375.392,2056.71 442.392,2056.71 ; 375.392,2064.21 442.392,2064.21 ; 375.392,2071.71 442.392,2071.71 ; 406.392,2019.325 406.392,2086.71 ; 248.943,2056.5 248.943,2086.5 343.943,2086.5 343.943,2056.5 248.943,2056.5
  lines w0.646: 253.944,2060 273.943,2060
  text "BOASFORMAT|А1|1|0|766141733|331102362|1000000000|2:1|" at 0,2540 h0
  text "DimV|0|-133858268|25590551|974409449|-5905512|-65944882|2||||js12|False|False|False|False" at 65,2475 h0
  text "DimH|-1181102|0|147933071|974409449|-492126|5413386|2||||js12|False|False|False|False" at 375.6,2474.996 h0
  text "DimH|-1279528|0|147933071|974409449|-1181102|3149606|2||||js12|False|False|False|False" at 375.75,2475 h0
  text "DimV|-17716535|-57086614|120078740|897637795|5905512|-26574803|2||||js12|False|False|False|False" at 305,2280 h0
  text "DimH|-76771654|0|102362205|840551181|-39370079|-5905512|2||||js12|False|False|False|False" at 260,2135 h0
  text "DimH|-94488189|57086614|120078740|840551181|-47244094|-9842520|2||||js12|False|False|False|False" at 305,2135 h0
  text "Таблица 3" at 375.373,2088.357 h7
  text "Таблица 2" at 248.924,2088.148 h7
  text "Контантная" at 376.373,2080.722 h7
  text "Длина, мм" at 316.931,2077.187 h7
  text "Размер, мм" at 411.373,2077.005 h7
  text "Диаметр, мм" at 281.431,2076.796 h7
  text "Обозначние" at 251.359,2076.513 h7
  text "площадка" at 379.373,2074.351 h7
  text "1,3х0,59" at 415.773,2066.146 h7
  text "0,25" at 291.359,2065.687 h7
  text "4350" at 323.931,2065 h7
  text "0,5" at 291.359,2058.187 h7
  text "1,45х0,9" at 415.106,2058.162 h7
  text "1120" at 323.924,2057.5 h7
  text "1,5х0,55" at 415.231,2050.537 h7
  text "1,97х0,6" at 414.731,2043.387 h7
  text "2,1х1,4" at 415.712,2035.762 h7
  text "2,15x1,0" at 414.862,2028.387 h7
  text "3,25х2,15" at 413.537,2021.012 h7
  text "DimV|984252|-66929134|54133858|74803150|6889764|-38385827|2||||js12|False|False|False|False" at 137.5,190 h0
  text "DimH|-47244094|0|55118110|74803150|-24606299|5905511|2||||js12|False|False|False|False" at 140,190 h0
  text "DimV|-8858267|-66929134|55118110|74803150|9842520|-37401575|2||||js12|False|False|False|False" at 140,190 h0
  text "DimV|-6|-34448813|53149606|72834640|8858268|-19685034|2||||js12|False|False|False|False" at 135,185 h0
  text "DimV|0|-28543307|46259843|36417323|5905511|-15748032|2||||js12|False|False|False|False" at 117.5,92.5 h0
  text "DimH|-8858267|0|55118110|36417323|-4921260|-32480315|2||||js12|False|False|False|False" at 140,92.5 h0
  text "DimH|-33464567|44291339|88582677|30511811|0|0|2||||js12|False|False|False|False" at 225,77.5 h0
  text "DimH|-34448820|0|44291340|9842520|-2952757|-6889764|2||||js12|False|False|False|False" at 112.5,25 h0
  text "SET2|Superlayer=MechanicalLayer7|Wsuperlayer=MechanicalLayer8|Layergrid=MechanicalLayer9|Werase=MechanicalLayer11|Layermark=MechanicalLayer12|Layerstamp=MechanicalLayer13|Thinline=0,18|Basicline=0,7|Gridline=0,18|Boardline=0,7|Contourpolygonline=0,3|PcbGridStep=1|PcbGridCleareanceAtView=0|PcbGridNumberEach=l4|PcbGridLineEach=l2|PcbGridCountSecondaryStrip=1|PcbGridEnabledStrip=True|PcbSignalGridEnabled=True|PcbSignalShowBukva=True|RealSignalLayerNames=False|PcbGridEnabledBothSide=False|PcbPolarGridEnabled=False|PcbPolarGridAngleStep=10|PcbPolarGridRadialStep=10|PcbPolarGridCenterPcbGrid=False|SilkShowPad=True|SilkViewName=Слой маркировки|SilkShowHole=True|SilkShowAxis=True|SilkShowBukva=False|SilkShowGrid=False|SolderShowGrid=False|SolderViewName=Слой маски|SolderShowAxis=False|SolderShowBukva=False|MainViewShowGrid=False|MainViewUseShapesDrill=False|ShowBukvaOnSboky=True|Density=2,2|TableName=Таблица 1|RazrezWidth=100|RealLayerNames=False|RazrezShowBukva=False|RazrezBukva=В-В|Sher=Rz 160|Asstoplayer=None|Asstoplayer2=MechanicalLayer1|Assbottomlayer=None|Assbottomlayer2=MechanicalLayer2|AssMinDiameterHoles=2|AssDim=False|AssMech=False|AssSilk=False|AssComponentSilk=False|AssFreeSilk=True|AssSmdPads=True|AssGridEnable=False|Mirror=Horisontal|PcbGridFontSize=3,5|PcbGridCenterZero=False|TTStampDistance=12|MainFontSize=5|PolyShtrihEnable=True|PolyStep=2|PcbDrillDrawingGridEnabled=False|PcbDrillDrawingViewName=Слой сверловки|PcbDrillDrawingShowBukva=False|PcbDrillDrawingShowAxis=False|PcbSignalLayersUseDrill=True|PcbSignalLayersUseShapesDrill=False|PcbSignalLayersShowAxis=False" at 0,0.025 h0
  text "TT0011#" at 0,0 h0
  text "TT0010#11  Печатная плата должна соответствовать ГОСТ 23751-86" at 0,0 h0
  text "TT0009#10  Обработка элементов проводящего рисунка иммерсионным оловом ImmSn по ГОСТ Р 56427-2015" at 0,0 h0
  text "TT0008#9  Паяльная маска Mechnic XP-50, зелёного цвета, толщина 30 мкм" at 0,0 h0
  text "TT0007#8   Неуказанные предельные отклонения по Н12±" at 0,0 h0
  text "TT0006#7   Позиционные обозначения ИЭТ выполнить краской МКЭ белая ОСТ92-1586-89, шрифт 2.0-ПРЗ по СТБ 992-95 методом шелкографии ГОСТ 2.304-81." at 0,0 h0
  text "TT0005#6   Сведения об элементах проводящего рисунка сведены в таблицах 1, 2, 3" at 0,0 h0
  text "TT0004#5   Группа жесткости 2 по ГОСТ 23752-79 при верхнем значении температуры окружающей среды (85±2) °С." at 0,0 h0
  text "TT0003#4   Класс точности 3 по ГОСТ 23751-86." at 0,0 h0
  text "TT0002#3   Шаг координатной сетки 1 мм по ГОСТ 10317-79. Линии сетки нанесены через четыре." at 0,0 h0
  text "TT0001#2   Плату изготовить комбинированным позитивным методом по ГОСТ 23752-79." at 0,0 h0
  text "TT0000#1   *  Размер для справок." at 0,0 h0
  text "STAMP|Разработал|Шостко" at 0,0 h0
  text "STAMP|Проверил|Смирнова" at 0,0 h0
  text "STAMP|Техконтроль|Смирнова" at 0,0 h0
  text "STAMP|Начальник отдела|" at 0,0 h0
  text "STAMP|Нормоконтроль|Лихачев" at 0,0 h0
  text "STAMP|Утвердил|Азаров" at 0,0 h0
  text "STAMP|Var|Реценз." at 0,0 h0
  text "STAMP|Tech|Т.контр." at 0,0 h0
  text "STAMP|Normo|Н.контр." at 0,0 h0
  text "STAMP|Check|Пров." at 0,0 h0
  text "STAMP|Design|Разраб." at 0,0 h0
  text "STAMP|Utv|Утв." at 0,0 h0
  text "STAMP|Обозначение|ГУИР.758724.001" at 0,0 h0
  text "STAMP|Первичная применяемость|" at 0,0 h0
  text "STAMP|Компания1|ЭВС, гр. 750701" at 0,0 h0
  text "STAMP|Наименование1|Плата печатная" at 0,0 h0
  text "STAMP|ТипДокумента|" at 0,0 h0
  text "STAMP|Материал1|Стеклотекстолит СФ-2-35Г-1,5" at 0,0 h0
  text "STAMP|Материал2|ГОСТ 10316-78" at 0,0 h0
  text "STAMP|Масса|0,066" at 0,0 h0
  text "STAMP|Lit|" at 0,0 h0
  text "STAMP|Наименование2|" at 0,0 h0
  text "STAMP|Компания2|" at 0,0 h0
  text "BOASVIADRILLTABLE:none,280000,46," at 0,0 h0
  text "2BOASDRILLTABLE:triangle,307087,Да,16,True,|smallquare,350394,Да,19,True,|bigquare,354331,Да,4,True,|smallrhomb,393701,Да,3,True,|bigrhomb,400000,Да,6,True,|hexagon,401575,Да,4,True,|circle0001,472441,Да,16,True,|circle0010,492126,Да,2,True,|circle0011,905512,Да,2,True,|circle0101,1181102,Нет,5,True,|circle0110,1338583,Да,4,True," at 0,0 h0
Mechanical 8:
  drawing of 20 lines, arcs and shapes, not listed
Mechanical 9:
  region: 65,2110 70,2110.658 69.5,2110 70,2109.342
  region: 305,2110 300,2109.342 300.5,2110 300,2110.658
  region: 375.6,2488.746 380.6,2489.404 380.1,2488.746 380.6,2488.088
  region: 372.6,2488.746 367.6,2488.088 368.1,2488.746 367.6,2489.404
  region: 320,2280 320.658,2275 320,2275.5 319.342,2275
  region: 320,2135 319.342,2140 320,2139.5 320.658,2140
  region: 50,2475 50.658,2470 50,2470.5 49.342,2470
  region: 50,2135 49.342,2140 50,2139.5 50.658,2140
  region: 260,2120 255,2119.342 255.5,2120 255,2120.658
  region: 65,2120 70,2120.658 69.5,2120 70,2119.342
  lines w0.18: 49,2135 65,2135 ; 49,2475 65,2475 ; 50,2135 50,2475 ; 65,2109 65,2135 ; 65,2110 305,2110 ; 65,2119 65,2135 ; 65,2120 260,2120 ; 260,2119 260,2135 ; 305,2109 305,2280 321,2280 ; 320,2135 320,2280 ; 364.6,2488.746 390.562,2488.746 ; 372.6,2474.996 372.6,2489.746 ; 375.6,2474.996 375.6,2489.746
  text "1,5" at 381.48,2491.276 h7.68
  text "170" at 47.47,2301.573 h7.68 r90
  text "72,5" at 317.47,2203.213 h7.68 r90
  text "97,5" at 158.064,2122.53 h7.68
  text "120" at 181.573,2112.53 h7.68
Mechanical 11:
  rectangle: 442.5,2135 486.5,2279
Mechanical 13:
  lines w0.18: 651,1956 716,1956 ; 651,1961 716,1961 ; 651,1966 716,1966 ; 651,1971 716,1971 ; 651,1976 716,1976 ; 651,1991 716,1991 ; 651,1996 716,1996 ; 651,2001 716,2001 ; 790.96,1971 790.96,1986 ; 795.98,1971 795.98,1986 ; 812.7,2522.1 815.8,2516.7 821.4,2526.5
  lines w0.7: 8,1976 20,1976 ; 8,2011 20,2011 ; 8,2036 20,2036 ; 8,2061 20,2061 ; 8,2178 20,2178 ; 13,1951 13,2096 ; 13,2118 13,2238 ; 20,2096 8,2096 8,1951 20,1951 ; 20,2118 8,2118 8,2238 20,2238 ; 20,2521 90,2521 90,2535 ; 651,1951 651,2006 836,2006 ; 651,1981 716,1981 ; 651,1986 716,1986 ; 658,1981 658,2006 ; 668,1951 668,2006 ; 691,1951 691,2006 ; 706,1951 706,2006 ; 716,1951 716,2006 836,2006 ; 716,1966 786,1966 836,1966 ; 716,1991 836,1991 ; 765,2524 770,2515 777.6,2529 ; 777.7,2529 828,2529 ; 786,1951 786,1991 ; 786,1971 836,1971 ; 786,1986 801,1986 836,1986 ; 801,1971 801,1991 ; 806.57,1966 806.57,1971 ; 818,1971 818,1991 ; 836,2014 836,2006 ; 20,1951 836,1951 836,2535 20,2535 20,1951
  text "ГУИР.758724.001" at 73.133,2530.108 h7.68 r180
  text "Rz 160" at 777.7,2516.7 h10.75
  text "(" at 809,2516.7 h10.75
  text ")" at 820,2516.7 h10.75
  text "Перв. примен." at 11.975,2197.382 h5.38 r90
  text "Справ. №" at 11.975,2140.783 h5.38 r90
  text "Подп. и дата" at 11.975,2068.969 h5.38 r90
  text "Инв. № дубл." at 11.975,2039.461 h5.38 r90
  text "1   *  Размер для справок. / 2   Плату изготовить комбинированным позитивным методом по ГОСТ 23752-79. / 3   Шаг координатной сетки 1 мм по ГОСТ 10317-79. Линии сетки нанесены через четыре. / 4   Класс точности 3 по ГОСТ 23751-86. / 5   Группа жесткости 2 по ГОСТ 23752-79 при верхнем значении температуры окружающей среды (85±2) °С. / 6   Сведения об элементах проводящего рисунка сведены в таблицах 1, 2, 3 / 7   Позиционные обозначения ИЭТ выполнить краской МКЭ белая ОСТ92-1586-89, шрифт 2.0-ПРЗ по СТБ 992-95 методом шелкографии ГОСТ 2.304-81. / 8   Неуказанные предельные отклонения по Н12± / 9  Паяльная маска Mechnic XP-50, зелёного цвета, толщина 30 мкм  / 10  Обработка элементов проводящего рисунка иммерсионным оловом ImmSn по ГОСТ Р 56427-2015 / 11  Печатная плата должна соответствовать ГОСТ 23751-86" at 650.45,2021.1 h7.68
  text "Взам. инв. №" at 11.975,2014.506 h5.38 r90
  text "ГУИР.758724.001" at 757.867,1996.392 h7.68
  text "Лит." at 790.328,1987.025 h5.38
  text "Масса" at 805.11,1987.025 h5.38
  text "Масштаб" at 820.137,1987.025 h5.38
  text "Подп. и дата" at 11.975,1985.469 h5.38 r90
  text "Изм." at 651.686,1982.025 h5.38
  text "Лист" at 659.024,1982.025 h5.38
  text "№ докум." at 673.271,1982.025 h5.38
  text "Подп." at 694.922,1982.025 h5.38
  text "Дата" at 706.965,1982.025 h5.38
  text "Плата печатная" at 733.34,1979.892 h7.68
  text "Разраб." at 651.533,1976.771 h5.38
  text "Шостко" at 668.68,1976.771 h5.38
  text "0,066" at 803.67,1976.392 h7.68
  text "2:1" at 823.918,1976.392 h7.68
  text "Пров." at 651.533,1971.771 h5.38
  text "Смирнова" at 668.68,1971.771 h5.38
  text "Т.контр." at 651.533,1966.771 h5.38
  text "Смирнова" at 668.68,1966.771 h5.38
  text "Лист" at 787.442,1966.771 h5.38
  text "Листов" at 808.485,1966.771 h5.38
  text "1" at 828.423,1966.771 h5.38
  text "Реценз." at 651.533,1961.771 h5.38
  text "Стеклотекстолит СФ-2-35Г-1,5" at 726.317,1960.025 h5.38
  text "Н.контр." at 651.533,1956.771 h5.38
  text "Лихачев" at 668.68,1956.771 h5.38
  text "ЭВС, гр. 750701" at 794.289,1956.392 h7.68
  text "Инв. № подл." at 11.975,1954.461 h5.38 r90
  text "ГОСТ 10316-78" at 739.986,1953.525 h5.38
  text "Утв." at 651.533,1951.771 h5.38
  text "Азаров" at 668.68,1951.771 h5.38
  text "Копировал" at 726.533,1946.771 h5.38
  text "Формат А1" at 807.71,1946.771 h5.38

## Text inside footprints (layer, text, board x,y; h text height)
BA1: Top Overlay "-" at 28.58,108.389 h1.27 r180; Top Overlay "+" at 62.632,107.5 h1.27 r180
ZBOAS205282114: Mechanical 12 "5,1" at 142.294,1966.138 h7.68; Mechanical 12 "Да" at 176.924,1966.138 h7.68; Mechanical 12 "3,4" at 106.249,1966.138 h7.68; Mechanical 12 "4" at 206.262,1966.138 h7.68; Mechanical 12 "-" at 144.167,1977.644 h7.68; Mechanical 12 "Нет" at 175.509,1977.644 h7.68; Mechanical 12 "3" at 107.732,1977.644 h7.68; Mechanical 12 "5" at 205.75,1977.644 h7.68; Mechanical 12 "3,3" at 142.177,1987.366 h7.68; Mechanical 12 "Да" at 176.924,1987.366 h7.68; Mechanical 12 "2,3" at 105.926,1987.366 h7.68; Mechanical 12 "2" at 205.718,1987.366 h7.68; Mechanical 12 "1,9" at 142.703,1996.386 h7.68; Mechanical 12 "Да" at 176.924,1996.386 h7.68; Mechanical 12 "1,25" at 105.289,1996.386 h7.68; Mechanical 12 "2" at 205.718,1996.386 h7.68; Mechanical 12 "1,8" at 142.778,2004.386 h7.68; Mechanical 12 "Да" at 176.924,2004.386 h7.68; Mechanical 12 "1,2" at 106.612,2004.386 h7.68; Mechanical 12 "16" at 205.452,2004.386 h7.68; Mechanical 12 "1,5" at 142.746,2012.386 h7.68; Mechanical 12 "Да" at 176.924,2012.386 h7.68; Mechanical 12 "1,02" at 105.257,2012.386 h7.68; Mechanical 12 "4" at 206.262,2012.386 h7.68; Mechanical 12 "1,9" at 142.703,2020.386 h7.68; Mechanical 12 "Да" at 176.924,2020.386 h7.68; Mechanical 12 "1,02" at 105.257,2020.386 h7.68; Mechanical 12 "6" at 206.013,2020.386 h7.68; Mechanical 12 "2,2" at 141.811,2030.489 h7.68; Mechanical 12 "Да" at 176.924,2030.489 h7.68; Mechanical 12 "1" at 108.3,2030.489 h7.68; Mechanical 12 "3" at 205.935,2030.489 h7.68; Mechanical 12 "1,4" at 143.105,2040.592 h7.68; Mechanical 12 "Да" at 176.924,2040.592 h7.68; Mechanical 12 "0,9" at 105.808,2040.592 h7.68; Mechanical 12 "4" at 206.262,2040.592 h7.68; Mechanical 12 "1,2" at 142.714,2048.592 h7.68; Mechanical 12 "Да" at 176.924,2048.592 h7.68; Mechanical 12 "0,89" at 104.454,2048.592 h7.68; Mechanical 12 "19" at 205.256,2048.592 h7.68; Mechanical 12 "1,1" at 143.048,2056.592 h7.68; Mechanical 12 "Да" at 176.924,2056.592 h7.68; Mechanical 12 "0,78" at 104.529,2056.592 h7.68; Mechanical 12 "16" at 205.452,2056.592 h7.68; Mechanical 12 "1,3" at 142.93,2064.592 h7.68; Mechanical 12 "переходное" at 62.475,2064.592 h7.68; Mechanical 12 "Да" at 176.924,2064.592 h7.68; Mechanical 12 "0,71" at 104.799,2064.592 h7.68; Mechanical 12 "46" at 204.701,2064.592 h7.68; Mechanical 12 "отв." at 203.169,2072.342 h7.68; Mechanical 12 "Кол." at 203.379,2079.842 h7.68; Mechanical 12 "металлизации" at 164.504,2072.342 h7.68; Mechanical 12 "Наличие" at 171.144,2079.842 h7.68; Mechanical 12 "площадки, мм" at 130.848,2072.342 h7.68; Mechanical 12 "Диаметр конт." at 129.625,2079.842 h7.68; Mechanical 12 "мм" at 106.235,2072.342 h7.68; Mechanical 12 "Диаметр отв.," at 94.284,2079.842 h7.68; Mechanical 12 "отв." at 66.966,2072.342 h7.68; Mechanical 12 "Обозначение" at 57.82,2079.842 h7.68; Mechanical 12 "Таблица 1" at 52.125,2087.2 h7.68
ZBOAS255984055: Mechanical 7 "120" at 302.602,2127.525 h5.38; Mechanical 7 "116" at 295.054,2127.525 h5.38; Mechanical 7 "112" at 286.925,2127.525 h5.38; Mechanical 7 "108" at 278.654,2127.525 h5.38; Mechanical 7 "104" at 270.883,2127.525 h5.38; Mechanical 7 "100" at 262.602,2127.525 h5.38; Mechanical 7 "96" at 255.266,2127.525 h5.38; Mechanical 7 "92" at 247.137,2127.525 h5.38; Mechanical 7 "88" at 239.047,2127.525 h5.38; Mechanical 7 "84" at 231.276,2127.525 h5.38; Mechanical 7 "80" at 222.995,2127.525 h5.38; Mechanical 7 "76" at 215.37,2127.525 h5.38; Mechanical 7 "72" at 207.241,2127.525 h5.38; Mechanical 7 "68" at 199.047,2127.525 h5.38; Mechanical 7 "64" at 191.276,2127.525 h5.38; Mechanical 7 "60" at 182.995,2127.525 h5.38; Mechanical 7 "56" at 175.159,2127.525 h5.38; Mechanical 7 "52" at 167.03,2127.525 h5.38; Mechanical 7 "48" at 159.077,2127.525 h5.38; Mechanical 7 "44" at 151.306,2127.525 h5.38; Mechanical 7 "40" at 143.025,2127.525 h5.38; Mechanical 7 "36" at 135.159,2127.525 h5.38; Mechanical 7 "32" at 127.03,2127.525 h5.38; Mechanical 7 "28" at 118.97,2127.525 h5.38; Mechanical 7 "24" at 111.199,2127.525 h5.38; Mechanical 7 "20" at 102.918,2127.525 h5.38; Mechanical 7 "16" at 95.686,2127.525 h5.38; Mechanical 7 "12" at 87.557,2127.525 h5.38; Mechanical 7 "8" at 79.995,2127.525 h5.38; Mechanical 7 "4" at 72.254,2127.525 h5.38; Mechanical 7 "0" at 63.943,2127.525 h5.38; Mechanical 7 "168" at 56.308,2469.525 h5.38; Mechanical 7 "164" at 56.766,2461.525 h5.38; Mechanical 7 "160" at 56.203,2453.525 h5.38; Mechanical 7 "156" at 56.686,2445.525 h5.38; Mechanical 7 "152" at 56.427,2437.525 h5.38; Mechanical 7 "148" at 56.308,2429.525 h5.38; Mechanical 7 "144" at 56.766,2421.525 h5.38; Mechanical 7 "140" at 56.203,2413.525 h5.38; Mechanical 7 "136" at 56.686,2405.525 h5.38; Mechanical 7 "132" at 56.427,2397.525 h5.38; Mechanical 7 "128" at 56.308,2389.525 h5.38; Mechanical 7 "124" at 56.766,2381.525 h5.38; Mechanical 7 "120" at 56.203,2373.525 h5.38; Mechanical 7 "116" at 57.109,2365.525 h5.38; Mechanical 7 "112" at 56.85,2357.525 h5.38; Mechanical 7 "108" at 56.308,2349.525 h5.38; Mechanical 7 "104" at 56.766,2341.525 h5.38; Mechanical 7 "100" at 56.203,2333.525 h5.38; Mechanical 7 "96" at 57.532,2325.525 h5.38; Mechanical 7 "92" at 57.273,2317.525 h5.38; Mechanical 7 "88" at 57.094,2309.525 h5.38; Mechanical 7 "84" at 57.552,2301.525 h5.38; Mechanical 7 "80" at 56.989,2293.525 h5.38; Mechanical 7 "76" at 57.741,2285.525 h5.38; Mechanical 7 "72" at 57.482,2277.525 h5.38; Mechanical 7 "68" at 57.094,2269.525 h5.38; Mechanical 7 "64" at 57.552,2261.525 h5.38; Mechanical 7 "60" at 56.989,2253.525 h5.38; Mechanical 7 "56" at 57.318,2245.525 h5.38; Mechanical 7 "52" at 57.059,2237.525 h5.38; Mechanical 7 "48" at 57.154,2229.525 h5.38; Mechanical 7 "44" at 57.611,2221.525 h5.38; Mechanical 7 "40" at 57.049,2213.525 h5.38; Mechanical 7 "36" at 57.318,2205.525 h5.38; Mechanical 7 "32" at 57.059,2197.525 h5.38; Mechanical 7 "28" at 56.94,2189.525 h5.38; Mechanical 7 "24" at 57.397,2181.525 h5.38; Mechanical 7 "20" at 56.835,2173.525 h5.38; Mechanical 7 "16" at 58.373,2165.525 h5.38; Mechanical 7 "12" at 58.114,2157.525 h5.38; Mechanical 7 "8" at 58.99,2149.525 h5.38; Mechanical 7 "4" at 59.507,2141.525 h5.38; Mechanical 7 "0" at 58.885,2133.525 h5.38
ZBOAS255984055: Mechanical 7 "XS8" at 297.97,2378.065 h3.05; Mechanical 7 "PS1" at 197.395,2342.838 h3.05; Mechanical 7 "XS6" at 292.957,2338.091 h3.05; Mechanical 7 "HL1" at 80,2470 h3.05; Mechanical 7 "BA1" at 80.444,2343.869 h3.05; Mechanical 7 "DD2" at 155.254,2341.169 h3.05; Mechanical 7 "XS4" at 293.964,2313.085 h3.05; Mechanical 7 "VD7" at 165,2310 h3.05; Mechanical 7 "+" at 150.264,2310 h2.54 r180; Mechanical 7 "-" at 82.16,2311.778 h2.54 r180; Mechanical 7 "VD4" at 244.507,2283.57 h3.05; Mechanical 7 "VD5" at 231.959,2263.554 h3.05; Mechanical 7 "VD1" at 222.155,2262.742 h3.05; Mechanical 7 "VD6" at 165,2300 h3.05; Mechanical 7 "SB1" at 218.644,2283.054 h3.05; Mechanical 7 "DD3" at 189.448,2282.569 h3.05; Mechanical 7 "C8" at 83.503,2264.374 h3.05; Mechanical 7 "C10" at 212.663,2261.722 h3.05; Mechanical 7 "C11" at 83.484,2254.405 h3.05; Mechanical 7 "R2" at 98.496,2254.379 h3.05; Mechanical 7 "SB2" at 119.524,2252.597 h3.05; Mechanical 7 "SB10" at 179.505,2252.582 h3.05; Mechanical 7 "SB6" at 149.555,2252.568 h3.05; Mechanical 7 "R9" at 238.462,2249.381 h3.05; Mechanical 7 "XS1" at 211.176,2242.175 h3.05; Mechanical 7 "R11" at 238.462,2239.374 h3.05; Mechanical 7 "C9" at 98.496,2244.359 h3.05; Mechanical 7 "R7" at 83.475,2244.405 h3.05; Mechanical 7 "R10" at 68.485,2244.403 h3.05; Mechanical 7 "SB11" at 179.542,2232.552 h3.05; Mechanical 7 "C1" at 236.945,2224.534 h3.05; Mechanical 7 "C2" at 246.953,2224.534 h3.05; Mechanical 7 "SB12" at 179.548,2212.581 h3.05; Mechanical 7 "SB3" at 119.518,2232.568 h3.05; Mechanical 7 "SB7" at 149.512,2232.567 h3.05; Mechanical 7 "C6" at 90.629,2229.785 h3.05; Mechanical 7 "C5" at 80.672,2229.785 h3.05; Mechanical 7 "R12" at 100.641,2229.772 h3.05; Mechanical 7 "R8" at 71.71,2229.77 h3.05; Mechanical 7 "SB8" at 149.509,2212.59 h3.05; Mechanical 7 "SB4" at 119.554,2212.552 h3.05; Mechanical 7 "XS3" at 249.295,2199.351 h3.05; Mechanical 7 "DA2" at 208.841,2194.068 h3.05; Mechanical 7 "XS7" at 223.935,2193.066 h3.05; Mechanical 7 "SB13" at 179.542,2192.558 h3.05; Mechanical 7 "DA1" at 97.747,2209.369 h3.05; Mechanical 7 "C4" at 82.638,2207.645 h3.05; Mechanical 7 "C3" at 72.638,2207.645 h3.05; Mechanical 7 "SB9" at 149.547,2192.598 h3.05; Mechanical 7 "SB5" at 119.524,2192.587 h3.05; Mechanical 7 "R5" at 218.65,2166.73 h3.05; Mechanical 7 "R6" at 207.643,2166.708 h3.05; Mechanical 7 "R1" at 197.636,2166.708 h3.05; Mechanical 7 "VD2" at 238.462,2165.104 h3.05; Mechanical 7 "VD3" at 230.435,2165.104 h3.05; Mechanical 7 "DD1" at 127.528,2172.361 h3.05; Mechanical 7 "R3" at 155.328,2169.39 h3.05; Mechanical 7 "XS2" at 89.579,2168.683 h3.05; Mechanical 7 "ZQ2" at 185.393,2166.556 h3.05; Mechanical 7 "VT1" at 170.491,2160.227 h3.05; Mechanical 7 "C7" at 178.508,2149.385 h3.05; Mechanical 7 "R4" at 155.302,2159.364 h3.05; Mechanical 7 "XS5" at 157.977,2150.204 h3.05; Mechanical 7 "ZQ1" at 132.979,2145.19 h3.05
ZBOAS1742184055: Mechanical 7 "120" at 440.102,2127.525 h5.38; Mechanical 7 "116" at 448.554,2127.525 h5.38; Mechanical 7 "112" at 456.425,2127.525 h5.38; Mechanical 7 "108" at 464.154,2127.525 h5.38; Mechanical 7 "104" at 472.383,2127.525 h5.38; Mechanical 7 "100" at 480.102,2127.525 h5.38; Mechanical 7 "96" at 488.766,2127.525 h5.38; Mechanical 7 "92" at 496.637,2127.525 h5.38; Mechanical 7 "88" at 504.547,2127.525 h5.38; Mechanical 7 "84" at 512.776,2127.525 h5.38; Mechanical 7 "80" at 520.495,2127.525 h5.38; Mechanical 7 "76" at 528.87,2127.525 h5.38; Mechanical 7 "72" at 536.741,2127.525 h5.38; Mechanical 7 "68" at 544.547,2127.525 h5.38; Mechanical 7 "64" at 552.776,2127.525 h5.38; Mechanical 7 "60" at 560.495,2127.525 h5.38; Mechanical 7 "56" at 568.659,2127.525 h5.38; Mechanical 7 "52" at 576.53,2127.525 h5.38; Mechanical 7 "48" at 584.577,2127.525 h5.38; Mechanical 7 "44" at 592.806,2127.525 h5.38; Mechanical 7 "40" at 600.525,2127.525 h5.38; Mechanical 7 "36" at 608.659,2127.525 h5.38; Mechanical 7 "32" at 616.53,2127.525 h5.38; Mechanical 7 "28" at 624.47,2127.525 h5.38; Mechanical 7 "24" at 632.699,2127.525 h5.38; Mechanical 7 "20" at 640.418,2127.525 h5.38; Mechanical 7 "16" at 649.186,2127.525 h5.38; Mechanical 7 "12" at 657.057,2127.525 h5.38; Mechanical 7 "8" at 665.495,2127.525 h5.38; Mechanical 7 "4" at 673.754,2127.525 h5.38; Mechanical 7 "0" at 681.443,2127.525 h5.38; Mechanical 7 "168" at 686.5,2469.525 h5.38; Mechanical 7 "164" at 686.5,2461.525 h5.38; Mechanical 7 "160" at 686.5,2453.525 h5.38; Mechanical 7 "156" at 686.5,2445.525 h5.38; Mechanical 7 "152" at 686.5,2437.525 h5.38; Mechanical 7 "148" at 686.5,2429.525 h5.38; Mechanical 7 "144" at 686.5,2421.525 h5.38; Mechanical 7 "140" at 686.5,2413.525 h5.38; Mechanical 7 "136" at 686.5,2405.525 h5.38; Mechanical 7 "132" at 686.5,2397.525 h5.38; Mechanical 7 "128" at 686.5,2389.525 h5.38; Mechanical 7 "124" at 686.5,2381.525 h5.38; Mechanical 7 "120" at 686.5,2373.525 h5.38; Mechanical 7 "116" at 686.5,2365.525 h5.38; Mechanical 7 "112" at 686.5,2357.525 h5.38; Mechanical 7 "108" at 686.5,2349.525 h5.38; Mechanical 7 "104" at 686.5,2341.525 h5.38; Mechanical 7 "100" at 686.5,2333.525 h5.38; Mechanical 7 "96" at 686.5,2325.525 h5.38; Mechanical 7 "92" at 686.5,2317.525 h5.38; Mechanical 7 "88" at 686.5,2309.525 h5.38; Mechanical 7 "84" at 686.5,2301.525 h5.38; Mechanical 7 "80" at 686.5,2293.525 h5.38; Mechanical 7 "76" at 686.5,2285.525 h5.38; Mechanical 7 "72" at 686.5,2277.525 h5.38; Mechanical 7 "68" at 686.5,2269.525 h5.38; Mechanical 7 "64" at 686.5,2261.525 h5.38; Mechanical 7 "60" at 686.5,2253.525 h5.38; Mechanical 7 "56" at 686.5,2245.525 h5.38; Mechanical 7 "52" at 686.5,2237.525 h5.38; Mechanical 7 "48" at 686.5,2229.525 h5.38; Mechanical 7 "44" at 686.5,2221.525 h5.38; Mechanical 7 "40" at 686.5,2213.525 h5.38; Mechanical 7 "36" at 686.5,2205.525 h5.38; Mechanical 7 "32" at 686.5,2197.525 h5.38; Mechanical 7 "28" at 686.5,2189.525 h5.38; Mechanical 7 "24" at 686.5,2181.525 h5.38; Mechanical 7 "20" at 686.5,2173.525 h5.38; Mechanical 7 "16" at 686.5,2165.525 h5.38; Mechanical 7 "12" at 686.5,2157.525 h5.38; Mechanical 7 "8" at 686.5,2149.525 h5.38; Mechanical 7 "4" at 686.5,2141.525 h5.38; Mechanical 7 "0" at 686.5,2133.525 h5.38